# EAGLE board Triple_Axis_Accelerometer_-_Gyro_Breakout_-_MPU-6050-GiantPanel-v12 (EAGLE 6.4), part 1 of 8
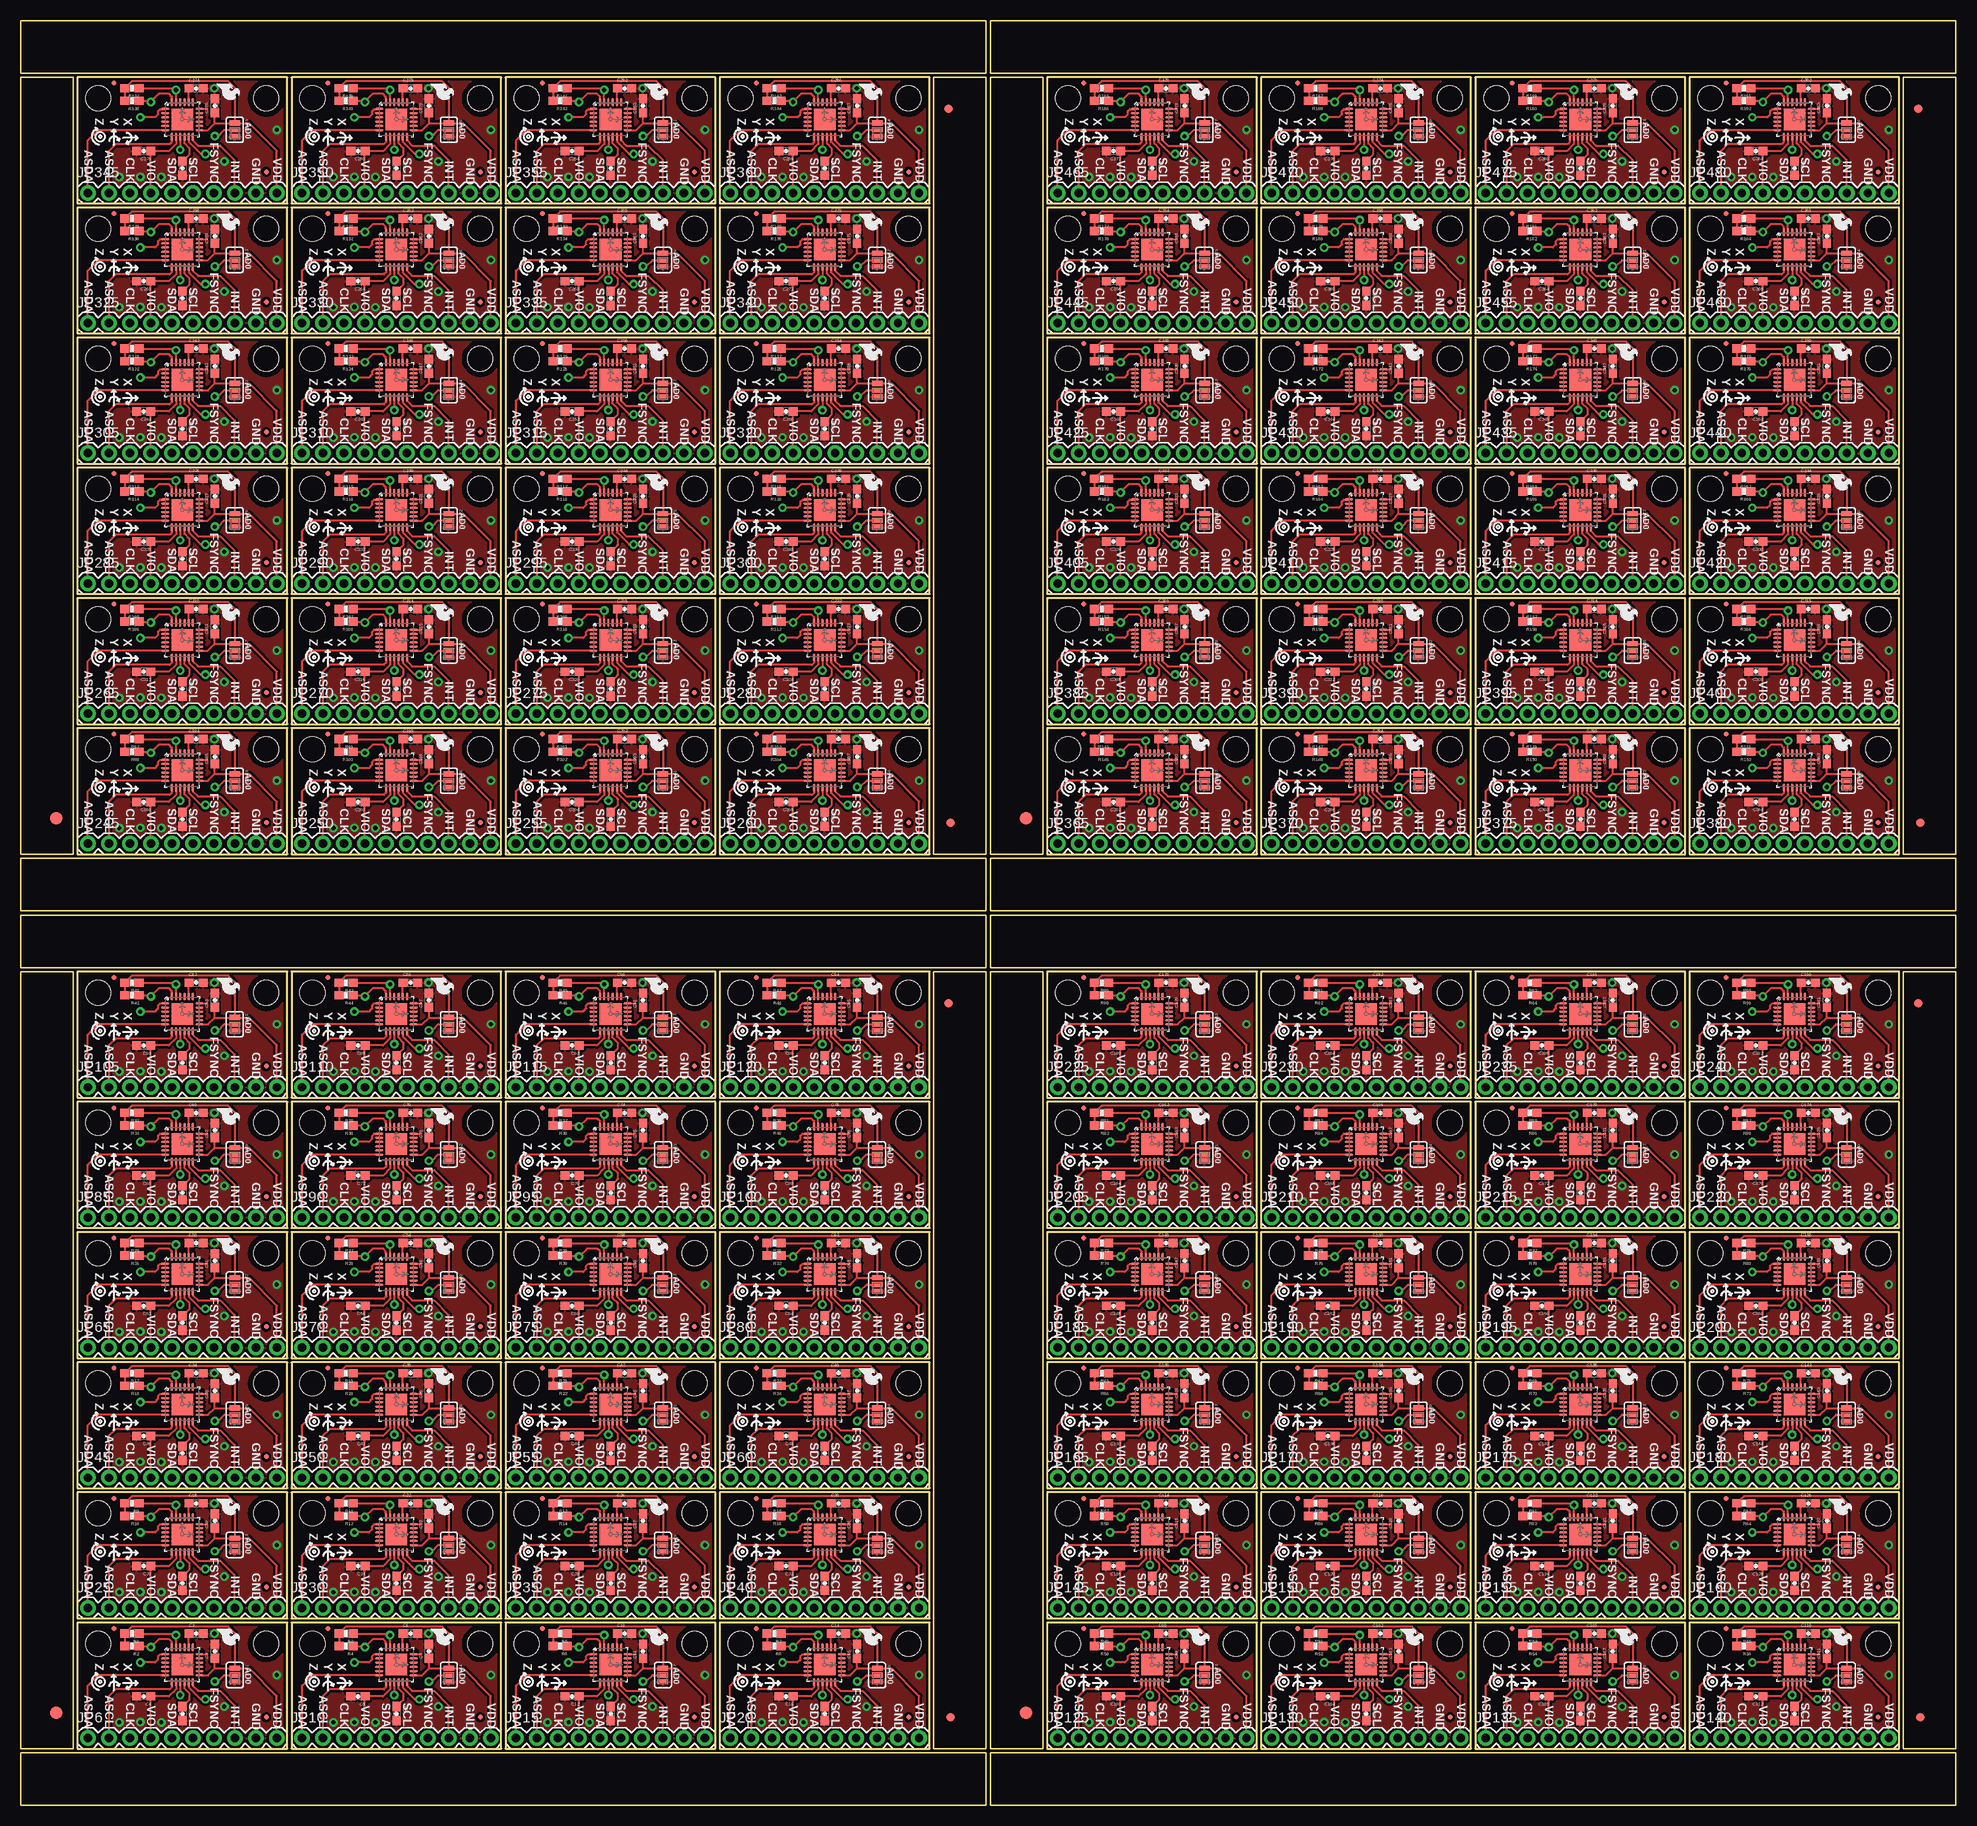
[diagram p0: board, top side]
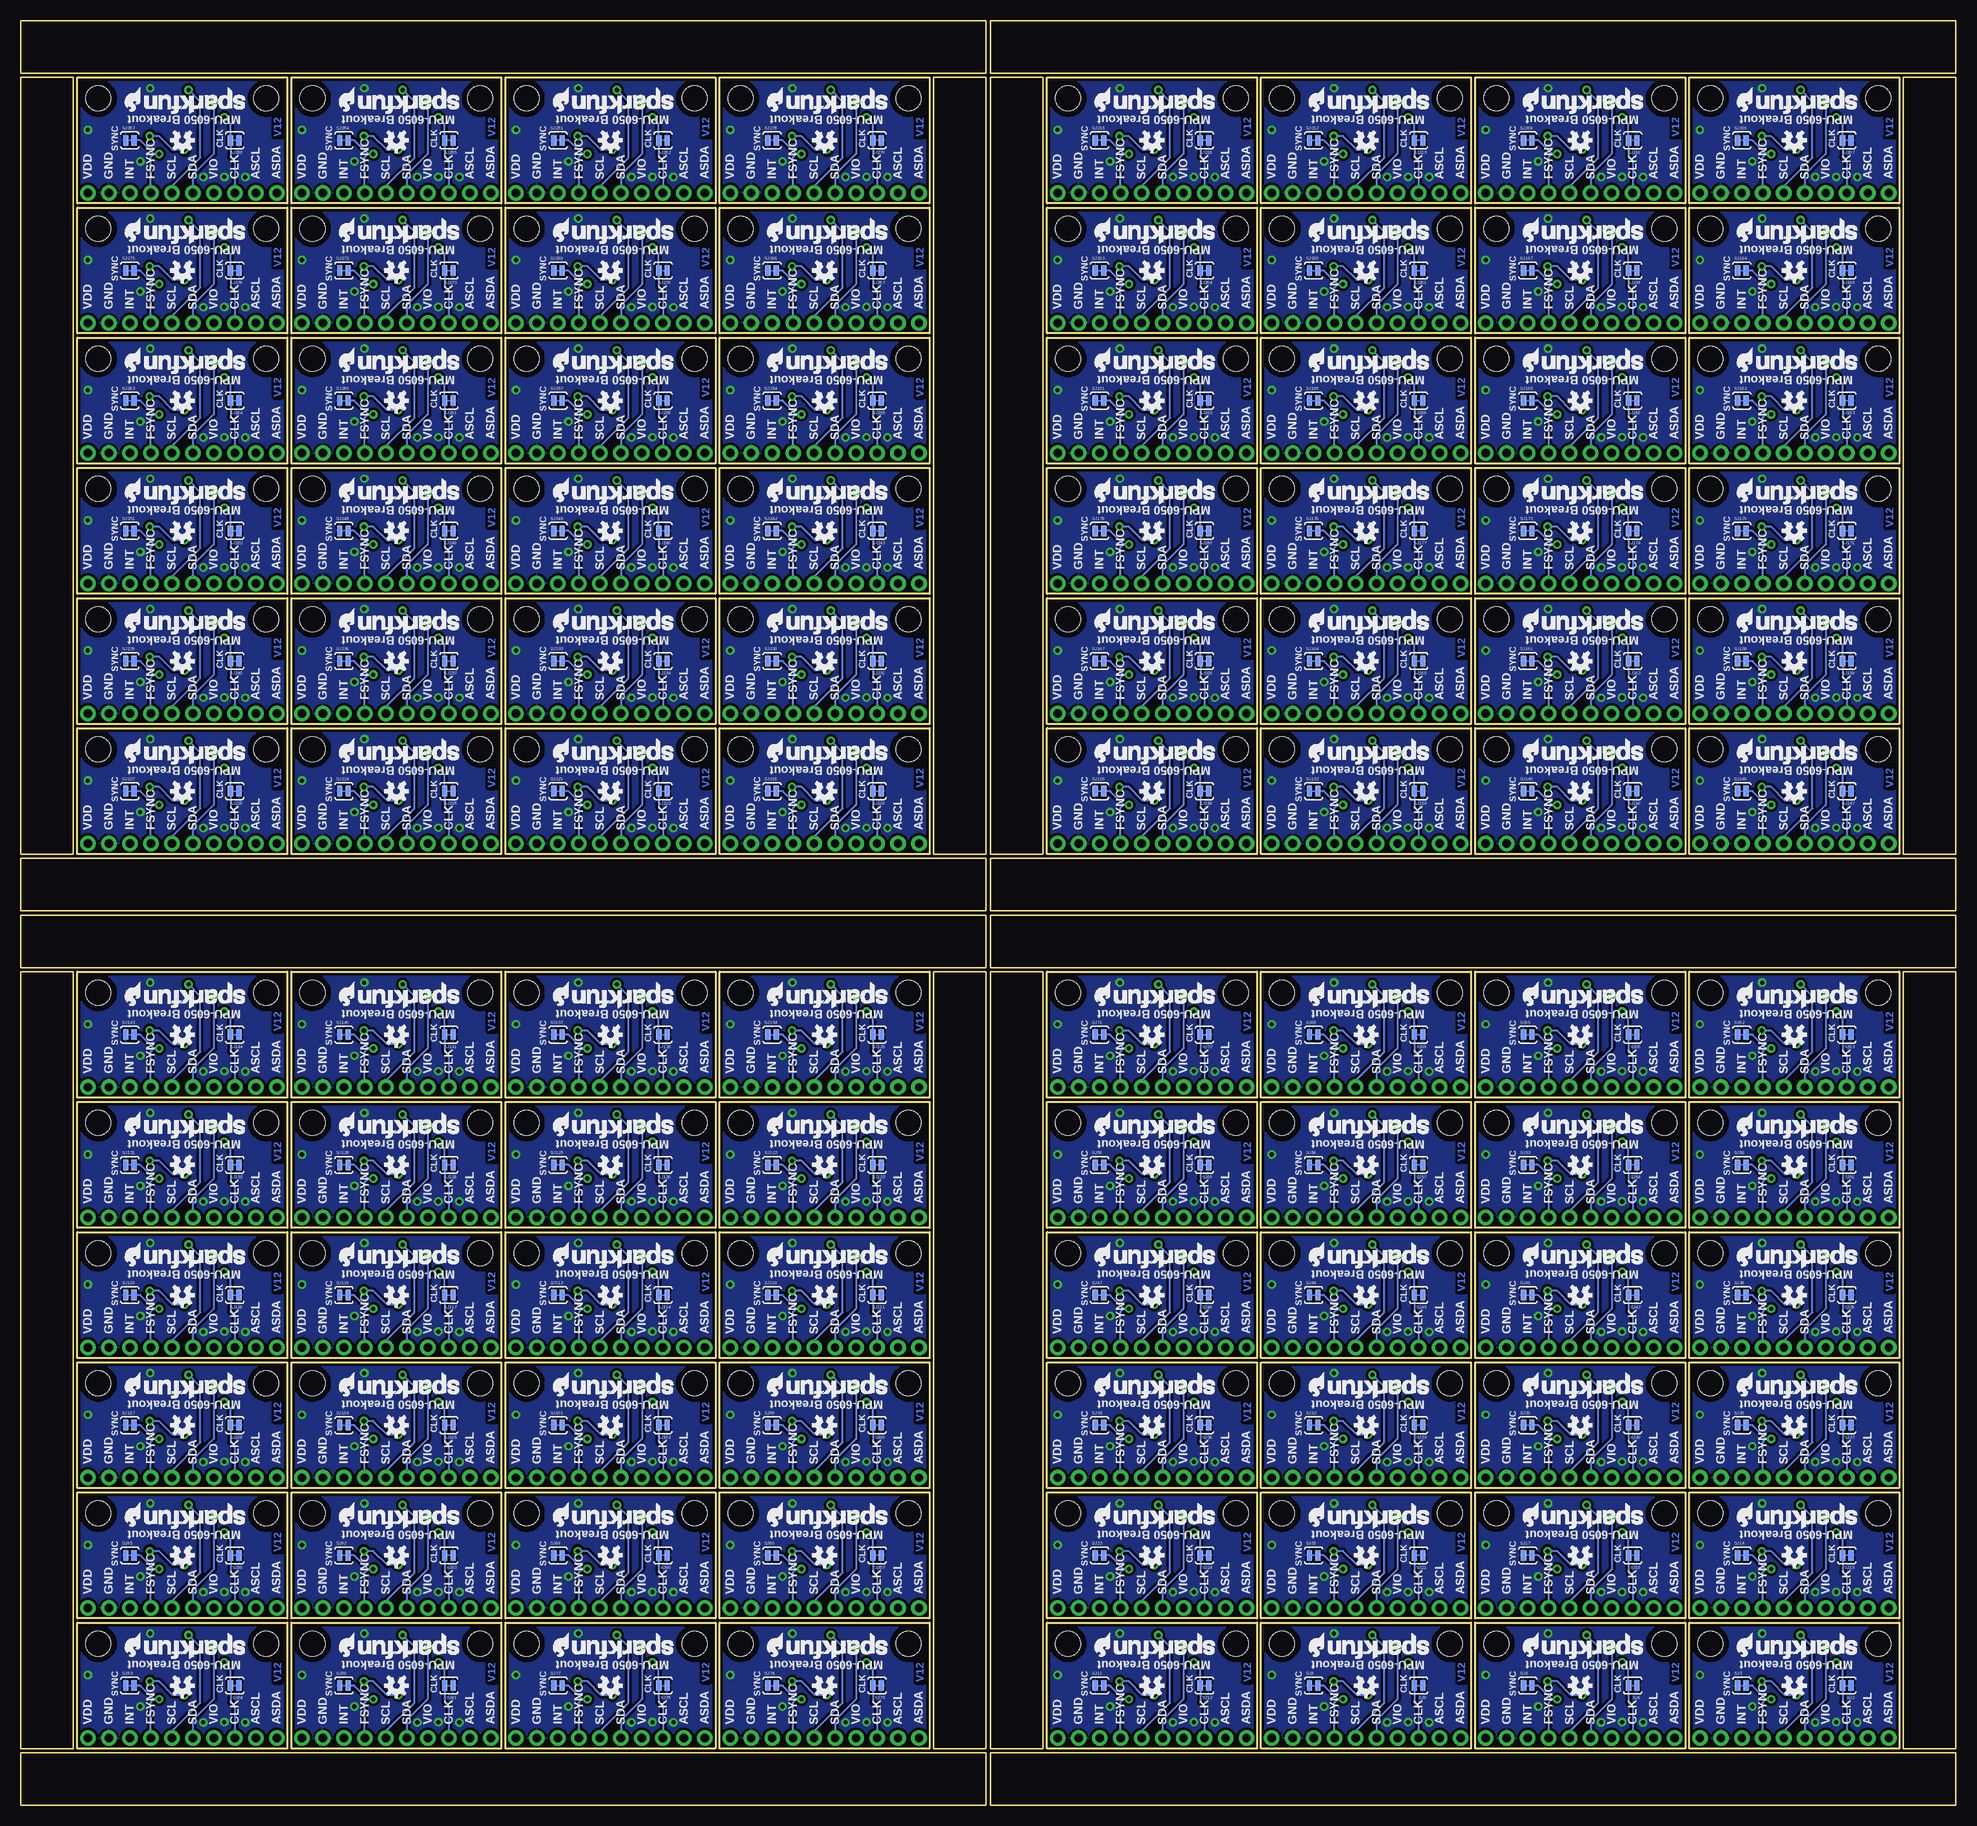
[diagram p1: board, bottom side, seen from below]

Size 234.19 x 215.9 mm. Coordinates in mm from the lower left corner, seen from the top.
Outline: 464 segments
Copper layers (1*16): Top 0.035mm / dielectric 1.5mm / Bottom 0.035mm
Design rules "SparkFun *": minimum track width 7mil, minimum drill 15mil, track to track 8mil, track to pad 8mil, pad to pad 8mil, via to via 8mil, smd to smd 8mil, copper to edge 8mil, drill to drill 8mil, minimum pad ring 12mil, minimum via ring 10mil, stop-mask expansion 4mil, vias tented up to drill 20mil, thermal gap 10mil
Net classes: 0 Default: width 0.203 mm; 1 vcc: width 0.254 mm; 2 GND: width 0.813 mm
tRestrict: area 21.4,18.4 to 22,18.7; area 47.3,18.4 to 47.9,18.7; area 73.2,18.4 to 73.8,18.7; area 99.1,18.4 to 99.7,18.7; area 21.4,34.2 to 22,34.4; area 47.3,34.2 to 47.9,34.4; area 73.2,34.2 to 73.8,34.4; area 99.1,34.2 to 99.7,34.4; area 21.4,49.9 to 22,50.2; area 47.3,49.9 to 47.9,50.2; area 73.2,49.9 to 73.8,50.2; area 99.1,49.9 to 99.7,50.2; 84 more areas

## Footprints (pad centres in the part's own frame; a part is rotated, then mirrored left to right if it is on the bottom)
0603-CAP = smd 1.1 x 1: 1 -0.85,0; 2 0.85,0
FIDUCIAL-1.5X3 = smd 1.5 x 1.5: 1 0,0
FIDUCIAL-1X2 = smd 1 x 1: 1 0,0
STAND-OFF-TIGHT = hole 3.048: 0,0
MICRO-FIDUCIAL = smd 0.635 x 0.635: 1 0,0
1X10 = drill 1.016 pad 1.88: 1 0,0; 2 2.54,0; 3 5.08,0; 4 7.62,0; 5 10.16,0; 6 12.7,0; 7 15.24,0; 8 17.78,0; 9 20.32,0; 10 22.86,0
0603-RES = smd 1.1 x 1: 1 -0.85,0; 2 0.85,0
SJ_3_PASTE2&3 = smd 0.635 x 1.27: 1 -0.813,0; 2 0,0; 3 0.813,0
SJ_2S-TRACE = smd 0.635 x 1.27: 1 -0.508,0; 2 0.508,0
QFN-24-4MM2 = smd 1.016 x 0.254: 1 -2.066,1.257; 2 -2.066,0.75; 3 -2.066,0.247; 4 -2.066,-0.287; 5 -2.066,-0.792; 6 -2.066,-1.297; 13 2.086,-1.297; 14 2.086,-0.792; 15 2.086,-0.287; 16 2.086,0.247; 17 2.086,0.75; 18 2.086,1.257 | smd 0.254 x 1.016: 7 -1.267,-2.122; 8 -0.762,-2.122; 9 -0.258,-2.122; 10 0.278,-2.122; 11 0.78,-2.122; 12 1.287,-2.122; 19 1.287,2.082; 20 0.78,2.082; 21 0.278,2.082; 22 -0.258,2.082; 23 -0.762,2.082; 24 -1.267,2.082 | smd 2.616 x 2.616: P$1 0.02,-0.01

## Placement (x,y rotation side)
C1  0.1uF  [0603-CAP]  19.58,11.1 270 top
C2  2.2nF  [0603-CAP]  21.26,20.78 0 top
C3  0.1uF  [0603-CAP]  23.5,18.64 90 top
C4  10nF  [0603-CAP]  14.91,13.18 180 top
C5  0.1uF  [0603-CAP]  45.49,11.1 270 top
C6  2.2nF  [0603-CAP]  47.17,20.78 0 top
C7  0.1uF  [0603-CAP]  49.4,18.64 90 top
C8  10nF  [0603-CAP]  40.82,13.18 180 top
C9  0.1uF  [0603-CAP]  71.4,11.1 270 top
C10  2.2nF  [0603-CAP]  73.08,20.78 0 top
C11  0.1uF  [0603-CAP]  75.31,18.64 90 top
C12  10nF  [0603-CAP]  66.73,13.18 180 top
C13  0.1uF  [0603-CAP]  97.31,11.1 270 top
C14  2.2nF  [0603-CAP]  98.98,20.78 0 top
C15  0.1uF  [0603-CAP]  101.22,18.64 90 top
C16  10nF  [0603-CAP]  92.63,13.18 180 top
C17  0.1uF  [0603-CAP]  19.58,26.85 270 top
C18  2.2nF  [0603-CAP]  21.26,36.53 0 top
C19  0.1uF  [0603-CAP]  23.5,34.39 90 top
C20  10nF  [0603-CAP]  14.91,28.93 180 top
C21  0.1uF  [0603-CAP]  45.49,26.85 270 top
C22  2.2nF  [0603-CAP]  47.17,36.53 0 top
C23  0.1uF  [0603-CAP]  49.4,34.39 90 top
C24  10nF  [0603-CAP]  40.82,28.93 180 top
C25  0.1uF  [0603-CAP]  71.4,26.85 270 top
C26  2.2nF  [0603-CAP]  73.08,36.53 0 top
C27  0.1uF  [0603-CAP]  75.31,34.39 90 top
C28  10nF  [0603-CAP]  66.73,28.93 180 top
C29  0.1uF  [0603-CAP]  97.31,26.85 270 top
C30  2.2nF  [0603-CAP]  98.98,36.53 0 top
C31  0.1uF  [0603-CAP]  101.22,34.39 90 top
C32  10nF  [0603-CAP]  92.63,28.93 180 top
C33  0.1uF  [0603-CAP]  19.58,42.6 270 top
C34  2.2nF  [0603-CAP]  21.26,52.27 0 top
C35  0.1uF  [0603-CAP]  23.5,50.14 90 top
C36  10nF  [0603-CAP]  14.91,44.68 180 top
C37  0.1uF  [0603-CAP]  45.49,42.6 270 top
C38  2.2nF  [0603-CAP]  47.17,52.27 0 top
C39  0.1uF  [0603-CAP]  49.4,50.14 90 top
C40  10nF  [0603-CAP]  40.82,44.68 180 top
C41  0.1uF  [0603-CAP]  71.4,42.6 270 top
C42  2.2nF  [0603-CAP]  73.08,52.27 0 top
C43  0.1uF  [0603-CAP]  75.31,50.14 90 top
C44  10nF  [0603-CAP]  66.73,44.68 180 top
C45  0.1uF  [0603-CAP]  97.31,42.6 270 top
C46  2.2nF  [0603-CAP]  98.98,52.27 0 top
C47  0.1uF  [0603-CAP]  101.22,50.14 90 top
C48  10nF  [0603-CAP]  92.63,44.68 180 top
C49  0.1uF  [0603-CAP]  19.58,58.34 270 top
C50  2.2nF  [0603-CAP]  21.26,68.02 0 top
C51  0.1uF  [0603-CAP]  23.5,65.89 90 top
C52  10nF  [0603-CAP]  14.91,60.43 180 top
C53  0.1uF  [0603-CAP]  45.49,58.34 270 top
C54  2.2nF  [0603-CAP]  47.17,68.02 0 top
C55  0.1uF  [0603-CAP]  49.4,65.89 90 top
C56  10nF  [0603-CAP]  40.82,60.43 180 top
C57  0.1uF  [0603-CAP]  71.4,58.34 270 top
C58  2.2nF  [0603-CAP]  73.08,68.02 0 top
C59  0.1uF  [0603-CAP]  75.31,65.89 90 top
C60  10nF  [0603-CAP]  66.73,60.43 180 top
C61  0.1uF  [0603-CAP]  97.31,58.34 270 top
C62  2.2nF  [0603-CAP]  98.98,68.02 0 top
C63  0.1uF  [0603-CAP]  101.22,65.89 90 top
C64  10nF  [0603-CAP]  92.63,60.43 180 top
C65  0.1uF  [0603-CAP]  19.58,74.09 270 top
C66  2.2nF  [0603-CAP]  21.26,83.77 0 top
C67  0.1uF  [0603-CAP]  23.5,81.64 90 top
C68  10nF  [0603-CAP]  14.91,76.17 180 top
C69  0.1uF  [0603-CAP]  45.49,74.09 270 top
C70  2.2nF  [0603-CAP]  47.17,83.77 0 top
C71  0.1uF  [0603-CAP]  49.4,81.64 90 top
C72  10nF  [0603-CAP]  40.82,76.17 180 top
C73  0.1uF  [0603-CAP]  71.4,74.09 270 top
C74  2.2nF  [0603-CAP]  73.08,83.77 0 top
C75  0.1uF  [0603-CAP]  75.31,81.64 90 top
C76  10nF  [0603-CAP]  66.73,76.17 180 top
C77  0.1uF  [0603-CAP]  97.31,74.09 270 top
C78  2.2nF  [0603-CAP]  98.98,83.77 0 top
C79  0.1uF  [0603-CAP]  101.22,81.64 90 top
C80  10nF  [0603-CAP]  92.63,76.17 180 top
C81  0.1uF  [0603-CAP]  19.58,89.84 270 top
C82  2.2nF  [0603-CAP]  21.26,99.52 0 top
C83  0.1uF  [0603-CAP]  23.5,97.38 90 top
C84  10nF  [0603-CAP]  14.91,91.92 180 top
C85  0.1uF  [0603-CAP]  45.49,89.84 270 top
C86  2.2nF  [0603-CAP]  47.17,99.52 0 top
C87  0.1uF  [0603-CAP]  49.4,97.38 90 top
C88  10nF  [0603-CAP]  40.82,91.92 180 top
C89  0.1uF  [0603-CAP]  71.4,89.84 270 top
C90  2.2nF  [0603-CAP]  73.08,99.52 0 top
C91  0.1uF  [0603-CAP]  75.31,97.38 90 top
C92  10nF  [0603-CAP]  66.73,91.92 180 top
C93  0.1uF  [0603-CAP]  97.31,89.84 270 top
C94  2.2nF  [0603-CAP]  98.98,99.52 0 top
C95  0.1uF  [0603-CAP]  101.22,97.38 90 top
C96  10nF  [0603-CAP]  92.63,91.92 180 top
C97  0.1uF  [0603-CAP]  136.93,11.1 270 top
C98  2.2nF  [0603-CAP]  138.61,20.78 0 top
C99  0.1uF  [0603-CAP]  140.84,18.64 90 top
C100  10nF  [0603-CAP]  132.26,13.18 180 top
C101  0.1uF  [0603-CAP]  162.84,11.1 270 top
C102  2.2nF  [0603-CAP]  164.52,20.78 0 top
C103  0.1uF  [0603-CAP]  166.75,18.64 90 top
C104  10nF  [0603-CAP]  158.17,13.18 180 top
C105  0.1uF  [0603-CAP]  188.75,11.1 270 top
C106  2.2nF  [0603-CAP]  190.42,20.78 0 top
C107  0.1uF  [0603-CAP]  192.66,18.64 90 top
C108  10nF  [0603-CAP]  184.07,13.18 180 top
C109  0.1uF  [0603-CAP]  214.66,11.1 270 top
C110  2.2nF  [0603-CAP]  216.33,20.78 0 top
C111  0.1uF  [0603-CAP]  218.57,18.64 90 top
C112  10nF  [0603-CAP]  209.98,13.18 180 top
C113  0.1uF  [0603-CAP]  136.93,26.85 270 top
C114  2.2nF  [0603-CAP]  138.61,36.53 0 top
C115  0.1uF  [0603-CAP]  140.84,34.39 90 top
C116  10nF  [0603-CAP]  132.26,28.93 180 top
C117  0.1uF  [0603-CAP]  162.84,26.85 270 top
C118  2.2nF  [0603-CAP]  164.52,36.53 0 top
C119  0.1uF  [0603-CAP]  166.75,34.39 90 top
C120  10nF  [0603-CAP]  158.17,28.93 180 top
C121  0.1uF  [0603-CAP]  188.75,26.85 270 top
C122  2.2nF  [0603-CAP]  190.42,36.53 0 top
C123  0.1uF  [0603-CAP]  192.66,34.39 90 top
C124  10nF  [0603-CAP]  184.07,28.93 180 top
C125  0.1uF  [0603-CAP]  214.66,26.85 270 top
C126  2.2nF  [0603-CAP]  216.33,36.53 0 top
C127  0.1uF  [0603-CAP]  218.57,34.39 90 top
C128  10nF  [0603-CAP]  209.98,28.93 180 top
C129  0.1uF  [0603-CAP]  136.93,42.6 270 top
C130  2.2nF  [0603-CAP]  138.61,52.27 0 top
C131  0.1uF  [0603-CAP]  140.84,50.14 90 top
C132  10nF  [0603-CAP]  132.26,44.68 180 top
C133  0.1uF  [0603-CAP]  162.84,42.6 270 top
C134  2.2nF  [0603-CAP]  164.52,52.27 0 top
C135  0.1uF  [0603-CAP]  166.75,50.14 90 top
C136  10nF  [0603-CAP]  158.17,44.68 180 top
C137  0.1uF  [0603-CAP]  188.75,42.6 270 top
C138  2.2nF  [0603-CAP]  190.42,52.27 0 top
C139  0.1uF  [0603-CAP]  192.66,50.14 90 top
C140  10nF  [0603-CAP]  184.07,44.68 180 top
C141  0.1uF  [0603-CAP]  214.66,42.6 270 top
C142  2.2nF  [0603-CAP]  216.33,52.27 0 top
C143  0.1uF  [0603-CAP]  218.57,50.14 90 top
C144  10nF  [0603-CAP]  209.98,44.68 180 top
C145  0.1uF  [0603-CAP]  136.93,58.34 270 top
C146  2.2nF  [0603-CAP]  138.61,68.02 0 top
C147  0.1uF  [0603-CAP]  140.84,65.89 90 top
C148  10nF  [0603-CAP]  132.26,60.43 180 top
C149  0.1uF  [0603-CAP]  162.84,58.34 270 top
C150  2.2nF  [0603-CAP]  164.52,68.02 0 top
C151  0.1uF  [0603-CAP]  166.75,65.89 90 top
C152  10nF  [0603-CAP]  158.17,60.43 180 top
C153  0.1uF  [0603-CAP]  188.75,58.34 270 top
C154  2.2nF  [0603-CAP]  190.42,68.02 0 top
C155  0.1uF  [0603-CAP]  192.66,65.89 90 top
C156  10nF  [0603-CAP]  184.07,60.43 180 top
C157  0.1uF  [0603-CAP]  214.66,58.34 270 top
C158  2.2nF  [0603-CAP]  216.33,68.02 0 top
C159  0.1uF  [0603-CAP]  218.57,65.89 90 top
C160  10nF  [0603-CAP]  209.98,60.43 180 top
C161  0.1uF  [0603-CAP]  136.93,74.09 270 top
C162  2.2nF  [0603-CAP]  138.61,83.77 0 top
C163  0.1uF  [0603-CAP]  140.84,81.64 90 top
C164  10nF  [0603-CAP]  132.26,76.17 180 top
C165  0.1uF  [0603-CAP]  162.84,74.09 270 top
C166  2.2nF  [0603-CAP]  164.52,83.77 0 top
C167  0.1uF  [0603-CAP]  166.75,81.64 90 top
C168  10nF  [0603-CAP]  158.17,76.17 180 top
C169  0.1uF  [0603-CAP]  188.75,74.09 270 top
C170  2.2nF  [0603-CAP]  190.42,83.77 0 top
C171  0.1uF  [0603-CAP]  192.66,81.64 90 top
C172  10nF  [0603-CAP]  184.07,76.17 180 top
C173  0.1uF  [0603-CAP]  214.66,74.09 270 top
C174  2.2nF  [0603-CAP]  216.33,83.77 0 top
C175  0.1uF  [0603-CAP]  218.57,81.64 90 top
C176  10nF  [0603-CAP]  209.98,76.17 180 top
C177  0.1uF  [0603-CAP]  136.93,89.84 270 top
C178  2.2nF  [0603-CAP]  138.61,99.52 0 top
C179  0.1uF  [0603-CAP]  140.84,97.38 90 top
C180  10nF  [0603-CAP]  132.26,91.92 180 top
C181  0.1uF  [0603-CAP]  162.84,89.84 270 top
C182  2.2nF  [0603-CAP]  164.52,99.52 0 top
C183  0.1uF  [0603-CAP]  166.75,97.38 90 top
C184  10nF  [0603-CAP]  158.17,91.92 180 top
C185  0.1uF  [0603-CAP]  188.75,89.84 270 top
C186  2.2nF  [0603-CAP]  190.42,99.52 0 top
C187  0.1uF  [0603-CAP]  192.66,97.38 90 top
C188  10nF  [0603-CAP]  184.07,91.92 180 top
C189  0.1uF  [0603-CAP]  214.66,89.84 270 top
C190  2.2nF  [0603-CAP]  216.33,99.52 0 top
C191  0.1uF  [0603-CAP]  218.57,97.38 90 top
C192  10nF  [0603-CAP]  209.98,91.92 180 top
C193  0.1uF  [0603-CAP]  19.58,119.3 270 top
C194  2.2nF  [0603-CAP]  21.26,128.98 0 top
C195  0.1uF  [0603-CAP]  23.5,126.85 90 top
C196  10nF  [0603-CAP]  14.91,121.39 180 top
C197  0.1uF  [0603-CAP]  45.49,119.3 270 top
C198  2.2nF  [0603-CAP]  47.17,128.98 0 top
C199  0.1uF  [0603-CAP]  49.4,126.85 90 top
C200  10nF  [0603-CAP]  40.82,121.39 180 top
C201  0.1uF  [0603-CAP]  71.4,119.3 270 top
C202  2.2nF  [0603-CAP]  73.08,128.98 0 top
C203  0.1uF  [0603-CAP]  75.31,126.85 90 top
C204  10nF  [0603-CAP]  66.73,121.39 180 top
C205  0.1uF  [0603-CAP]  97.31,119.3 270 top
C206  2.2nF  [0603-CAP]  98.98,128.98 0 top
C207  0.1uF  [0603-CAP]  101.22,126.85 90 top
C208  10nF  [0603-CAP]  92.63,121.39 180 top
C209  0.1uF  [0603-CAP]  19.58,135.05 270 top
C210  2.2nF  [0603-CAP]  21.26,144.73 0 top
C211  0.1uF  [0603-CAP]  23.5,142.6 90 top
C212  10nF  [0603-CAP]  14.91,137.13 180 top
C213  0.1uF  [0603-CAP]  45.49,135.05 270 top
C214  2.2nF  [0603-CAP]  47.17,144.73 0 top
C215  0.1uF  [0603-CAP]  49.4,142.6 90 top
C216  10nF  [0603-CAP]  40.82,137.13 180 top
C217  0.1uF  [0603-CAP]  71.4,135.05 270 top
C218  2.2nF  [0603-CAP]  73.08,144.73 0 top
C219  0.1uF  [0603-CAP]  75.31,142.6 90 top
C220  10nF  [0603-CAP]  66.73,137.13 180 top
C221  0.1uF  [0603-CAP]  97.31,135.05 270 top
C222  2.2nF  [0603-CAP]  98.98,144.73 0 top
C223  0.1uF  [0603-CAP]  101.22,142.6 90 top
C224  10nF  [0603-CAP]  92.63,137.13 180 top
C225  0.1uF  [0603-CAP]  19.58,150.8 270 top
C226  2.2nF  [0603-CAP]  21.26,160.48 0 top
C227  0.1uF  [0603-CAP]  23.5,158.34 90 top
C228  10nF  [0603-CAP]  14.91,152.88 180 top
C229  0.1uF  [0603-CAP]  45.49,150.8 270 top
C230  2.2nF  [0603-CAP]  47.17,160.48 0 top
C231  0.1uF  [0603-CAP]  49.4,158.34 90 top
C232  10nF  [0603-CAP]  40.82,152.88 180 top
C233  0.1uF  [0603-CAP]  71.4,150.8 270 top
C234  2.2nF  [0603-CAP]  73.08,160.48 0 top
C235  0.1uF  [0603-CAP]  75.31,158.34 90 top
C236  10nF  [0603-CAP]  66.73,152.88 180 top
C237  0.1uF  [0603-CAP]  97.31,150.8 270 top
C238  2.2nF  [0603-CAP]  98.98,160.48 0 top
C239  0.1uF  [0603-CAP]  101.22,158.34 90 top
C240  10nF  [0603-CAP]  92.63,152.88 180 top
C241  0.1uF  [0603-CAP]  19.58,166.55 270 top
C242  2.2nF  [0603-CAP]  21.26,176.23 0 top
C243  0.1uF  [0603-CAP]  23.5,174.09 90 top
C244  10nF  [0603-CAP]  14.91,168.63 180 top
C245  0.1uF  [0603-CAP]  45.49,166.55 270 top
C246  2.2nF  [0603-CAP]  47.17,176.23 0 top
C247  0.1uF  [0603-CAP]  49.4,174.09 90 top
C248  10nF  [0603-CAP]  40.82,168.63 180 top
C249  0.1uF  [0603-CAP]  71.4,166.55 270 top
C250  2.2nF  [0603-CAP]  73.08,176.23 0 top
C251  0.1uF  [0603-CAP]  75.31,174.09 90 top
C252  10nF  [0603-CAP]  66.73,168.63 180 top
C253  0.1uF  [0603-CAP]  97.31,166.55 270 top
C254  2.2nF  [0603-CAP]  98.98,176.23 0 top
C255  0.1uF  [0603-CAP]  101.22,174.09 90 top
C256  10nF  [0603-CAP]  92.63,168.63 180 top
C257  0.1uF  [0603-CAP]  19.58,182.3 270 top
C258  2.2nF  [0603-CAP]  21.26,191.97 0 top
C259  0.1uF  [0603-CAP]  23.5,189.84 90 top
C260  10nF  [0603-CAP]  14.91,184.38 180 top
C261  0.1uF  [0603-CAP]  45.49,182.3 270 top
C262  2.2nF  [0603-CAP]  47.17,191.97 0 top
C263  0.1uF  [0603-CAP]  49.4,189.84 90 top
C264  10nF  [0603-CAP]  40.82,184.38 180 top
C265  0.1uF  [0603-CAP]  71.4,182.3 270 top
C266  2.2nF  [0603-CAP]  73.08,191.97 0 top
C267  0.1uF  [0603-CAP]  75.31,189.84 90 top
C268  10nF  [0603-CAP]  66.73,184.38 180 top
C269  0.1uF  [0603-CAP]  97.31,182.3 270 top
C270  2.2nF  [0603-CAP]  98.98,191.97 0 top
C271  0.1uF  [0603-CAP]  101.22,189.84 90 top
C272  10nF  [0603-CAP]  92.63,184.38 180 top
C273  0.1uF  [0603-CAP]  19.58,198.04 270 top
C274  2.2nF  [0603-CAP]  21.26,207.72 0 top
C275  0.1uF  [0603-CAP]  23.5,205.59 90 top
C276  10nF  [0603-CAP]  14.91,200.13 180 top
C277  0.1uF  [0603-CAP]  45.49,198.04 270 top
C278  2.2nF  [0603-CAP]  47.17,207.72 0 top
C279  0.1uF  [0603-CAP]  49.4,205.59 90 top
C280  10nF  [0603-CAP]  40.82,200.13 180 top
C281  0.1uF  [0603-CAP]  71.4,198.04 270 top
C282  2.2nF  [0603-CAP]  73.08,207.72 0 top
C283  0.1uF  [0603-CAP]  75.31,205.59 90 top
C284  10nF  [0603-CAP]  66.73,200.13 180 top
C285  0.1uF  [0603-CAP]  97.31,198.04 270 top
C286  2.2nF  [0603-CAP]  98.98,207.72 0 top
C287  0.1uF  [0603-CAP]  101.22,205.59 90 top
C288  10nF  [0603-CAP]  92.63,200.13 180 top
C289  0.1uF  [0603-CAP]  136.93,119.3 270 top
C290  2.2nF  [0603-CAP]  138.61,128.98 0 top
C291  0.1uF  [0603-CAP]  140.84,126.85 90 top
C292  10nF  [0603-CAP]  132.26,121.39 180 top
C293  0.1uF  [0603-CAP]  162.84,119.3 270 top
C294  2.2nF  [0603-CAP]  164.52,128.98 0 top
C295  0.1uF  [0603-CAP]  166.75,126.85 90 top
C296  10nF  [0603-CAP]  158.17,121.39 180 top
C297  0.1uF  [0603-CAP]  188.75,119.3 270 top
C298  2.2nF  [0603-CAP]  190.42,128.98 0 top
C299  0.1uF  [0603-CAP]  192.66,126.85 90 top
C300  10nF  [0603-CAP]  184.07,121.39 180 top
C301  0.1uF  [0603-CAP]  214.66,119.3 270 top
C302  2.2nF  [0603-CAP]  216.33,128.98 0 top
C303  0.1uF  [0603-CAP]  218.57,126.85 90 top
C304  10nF  [0603-CAP]  209.98,121.39 180 top
C305  0.1uF  [0603-CAP]  136.93,135.05 270 top
C306  2.2nF  [0603-CAP]  138.61,144.73 0 top
C307  0.1uF  [0603-CAP]  140.84,142.6 90 top
C308  10nF  [0603-CAP]  132.26,137.13 180 top
C309  0.1uF  [0603-CAP]  162.84,135.05 270 top
C310  2.2nF  [0603-CAP]  164.52,144.73 0 top
C311  0.1uF  [0603-CAP]  166.75,142.6 90 top
C312  10nF  [0603-CAP]  158.17,137.13 180 top
C313  0.1uF  [0603-CAP]  188.75,135.05 270 top
C314  2.2nF  [0603-CAP]  190.42,144.73 0 top
C315  0.1uF  [0603-CAP]  192.66,142.6 90 top
C316  10nF  [0603-CAP]  184.07,137.13 180 top
C317  0.1uF  [0603-CAP]  214.66,135.05 270 top
C318  2.2nF  [0603-CAP]  216.33,144.73 0 top
C319  0.1uF  [0603-CAP]  218.57,142.6 90 top
C320  10nF  [0603-CAP]  209.98,137.13 180 top
C321  0.1uF  [0603-CAP]  136.93,150.8 270 top
C322  2.2nF  [0603-CAP]  138.61,160.48 0 top
C323  0.1uF  [0603-CAP]  140.84,158.34 90 top
C324  10nF  [0603-CAP]  132.26,152.88 180 top
C325  0.1uF  [0603-CAP]  162.84,150.8 270 top
C326  2.2nF  [0603-CAP]  164.52,160.48 0 top
C327  0.1uF  [0603-CAP]  166.75,158.34 90 top
C328  10nF  [0603-CAP]  158.17,152.88 180 top
C329  0.1uF  [0603-CAP]  188.75,150.8 270 top
C330  2.2nF  [0603-CAP]  190.42,160.48 0 top
C331  0.1uF  [0603-CAP]  192.66,158.34 90 top
C332  10nF  [0603-CAP]  184.07,152.88 180 top
C333  0.1uF  [0603-CAP]  214.66,150.8 270 top
C334  2.2nF  [0603-CAP]  216.33,160.48 0 top
C335  0.1uF  [0603-CAP]  218.57,158.34 90 top
C336  10nF  [0603-CAP]  209.98,152.88 180 top
C337  0.1uF  [0603-CAP]  136.93,166.55 270 top
C338  2.2nF  [0603-CAP]  138.61,176.23 0 top
C339  0.1uF  [0603-CAP]  140.84,174.09 90 top
C340  10nF  [0603-CAP]  132.26,168.63 180 top
C341  0.1uF  [0603-CAP]  162.84,166.55 270 top
C342  2.2nF  [0603-CAP]  164.52,176.23 0 top
C343  0.1uF  [0603-CAP]  166.75,174.09 90 top
C344  10nF  [0603-CAP]  158.17,168.63 180 top
C345  0.1uF  [0603-CAP]  188.75,166.55 270 top
C346  2.2nF  [0603-CAP]  190.42,176.23 0 top
C347  0.1uF  [0603-CAP]  192.66,174.09 90 top
C348  10nF  [0603-CAP]  184.07,168.63 180 top
C349  0.1uF  [0603-CAP]  214.66,166.55 270 top
C350  2.2nF  [0603-CAP]  216.33,176.23 0 top
C351  0.1uF  [0603-CAP]  218.57,174.09 90 top
C352  10nF  [0603-CAP]  209.98,168.63 180 top
C353  0.1uF  [0603-CAP]  136.93,182.3 270 top
C354  2.2nF  [0603-CAP]  138.61,191.97 0 top
C355  0.1uF  [0603-CAP]  140.84,189.84 90 top
C356  10nF  [0603-CAP]  132.26,184.38 180 top
C357  0.1uF  [0603-CAP]  162.84,182.3 270 top
C358  2.2nF  [0603-CAP]  164.52,191.97 0 top
C359  0.1uF  [0603-CAP]  166.75,189.84 90 top
C360  10nF  [0603-CAP]  158.17,184.38 180 top
C361  0.1uF  [0603-CAP]  188.75,182.3 270 top
C362  2.2nF  [0603-CAP]  190.42,191.97 0 top
C363  0.1uF  [0603-CAP]  192.66,189.84 90 top
C364  10nF  [0603-CAP]  184.07,184.38 180 top
C365  0.1uF  [0603-CAP]  214.66,182.3 270 top
C366  2.2nF  [0603-CAP]  216.33,191.97 0 top
C367  0.1uF  [0603-CAP]  218.57,189.84 90 top
C368  10nF  [0603-CAP]  209.98,184.38 180 top
C369  0.1uF  [0603-CAP]  136.93,198.04 270 top
C370  2.2nF  [0603-CAP]  138.61,207.72 0 top
C371  0.1uF  [0603-CAP]  140.84,205.59 90 top
C372  10nF  [0603-CAP]  132.26,200.13 180 top
C373  0.1uF  [0603-CAP]  162.84,198.04 270 top
C374  2.2nF  [0603-CAP]  164.52,207.72 0 top
C375  0.1uF  [0603-CAP]  166.75,205.59 90 top
C376  10nF  [0603-CAP]  158.17,200.13 180 top
C377  0.1uF  [0603-CAP]  188.75,198.04 270 top
C378  2.2nF  [0603-CAP]  190.42,207.72 0 top
C379  0.1uF  [0603-CAP]  192.66,205.59 90 top
C380  10nF  [0603-CAP]  184.07,200.13 180 top
C381  0.1uF  [0603-CAP]  214.66,198.04 270 top
C382  2.2nF  [0603-CAP]  216.33,207.72 0 top
C383  0.1uF  [0603-CAP]  218.57,205.59 90 top
C384  10nF  [0603-CAP]  209.98,200.13 180 top
E$1  [FIDUCIAL-1.5X3]  4.32,11.18 0 top
E$2  [FIDUCIAL-1X2]  229.87,10.67 0 top
E$3  [FIDUCIAL-1X2]  229.62,97.03 180 top
E$4  [FIDUCIAL-1X2]  112.52,10.67 0 top
E$5  [FIDUCIAL-1X2]  112.27,97.03 180 top
E$6  [FIDUCIAL-1.5X3]  121.67,11.18 0 top
E$7  [FIDUCIAL-1X2]  112.52,118.87 0 top
E$8  [FIDUCIAL-1X2]  112.27,205.23 180 top
E$9  [FIDUCIAL-1.5X3]  4.32,119.38 0 top
E$10  [FIDUCIAL-1X2]  229.87,118.87 0 top
E$11  [FIDUCIAL-1X2]  229.62,205.23 180 top
E$12  [FIDUCIAL-1.5X3]  121.67,119.38 0 top
JP1  STAND-OFFTIGHT  [STAND-OFF-TIGHT]  55.63,19.56 270 top
JP2  FIDUCIALUFIDUCIAL  [MICRO-FIDUCIAL]  11.3,21.39 270 top
JP3  STAND-OFFTIGHT  [STAND-OFF-TIGHT]  29.72,19.56 270 top
JP4  STAND-OFFTIGHT  [STAND-OFF-TIGHT]  9.4,19.56 270 top
JP5  FIDUCIALUFIDUCIAL  [MICRO-FIDUCIAL]  29.72,10.67 270 top
JP6  M10"  [1X10]  8.13,8.13 0 top
JP7  STAND-OFFTIGHT  [STAND-OFF-TIGHT]  35.31,19.56 270 top
JP8  FIDUCIALUFIDUCIAL  [MICRO-FIDUCIAL]  37.21,21.39 270 top
JP9  FIDUCIALUFIDUCIAL  [MICRO-FIDUCIAL]  55.63,10.67 270 top
JP10  M10"  [1X10]  34.04,8.13 0 top
JP11  STAND-OFFTIGHT  [STAND-OFF-TIGHT]  81.53,19.56 270 top
JP12  STAND-OFFTIGHT  [STAND-OFF-TIGHT]  61.21,19.56 270 top
JP13  FIDUCIALUFIDUCIAL  [MICRO-FIDUCIAL]  63.12,21.39 270 top
JP14  FIDUCIALUFIDUCIAL  [MICRO-FIDUCIAL]  81.53,10.67 270 top
JP15  M10"  [1X10]  59.94,8.13 0 top
JP16  STAND-OFFTIGHT  [STAND-OFF-TIGHT]  107.44,19.56 270 top
JP17  STAND-OFFTIGHT  [STAND-OFF-TIGHT]  87.12,19.56 270 top
JP18  FIDUCIALUFIDUCIAL  [MICRO-FIDUCIAL]  89.03,21.39 270 top
JP19  FIDUCIALUFIDUCIAL  [MICRO-FIDUCIAL]  107.44,10.67 270 top
JP20  M10"  [1X10]  85.85,8.13 0 top
JP21  STAND-OFFTIGHT  [STAND-OFF-TIGHT]  29.72,35.31 270 top
JP22  STAND-OFFTIGHT  [STAND-OFF-TIGHT]  9.4,35.31 270 top
JP23  FIDUCIALUFIDUCIAL  [MICRO-FIDUCIAL]  11.3,37.13 270 top
JP24  FIDUCIALUFIDUCIAL  [MICRO-FIDUCIAL]  29.72,26.42 270 top
JP25  M10"  [1X10]  8.13,23.88 0 top
JP26  STAND-OFFTIGHT  [STAND-OFF-TIGHT]  55.63,35.31 270 top
JP27  STAND-OFFTIGHT  [STAND-OFF-TIGHT]  35.31,35.31 270 top
JP28  FIDUCIALUFIDUCIAL  [MICRO-FIDUCIAL]  37.21,37.13 270 top
JP29  FIDUCIALUFIDUCIAL  [MICRO-FIDUCIAL]  55.63,26.42 270 top
JP30  M10"  [1X10]  34.04,23.88 0 top
JP31  STAND-OFFTIGHT  [STAND-OFF-TIGHT]  81.53,35.31 270 top
JP32  STAND-OFFTIGHT  [STAND-OFF-TIGHT]  61.21,35.31 270 top
JP33  FIDUCIALUFIDUCIAL  [MICRO-FIDUCIAL]  63.12,37.13 270 top
JP34  FIDUCIALUFIDUCIAL  [MICRO-FIDUCIAL]  81.53,26.42 270 top
JP35  M10"  [1X10]  59.94,23.88 0 top
JP36  STAND-OFFTIGHT  [STAND-OFF-TIGHT]  107.44,35.31 270 top
JP37  STAND-OFFTIGHT  [STAND-OFF-TIGHT]  87.12,35.31 270 top
JP38  FIDUCIALUFIDUCIAL  [MICRO-FIDUCIAL]  89.03,37.13 270 top
JP39  FIDUCIALUFIDUCIAL  [MICRO-FIDUCIAL]  107.44,26.42 270 top
JP40  M10"  [1X10]  85.85,23.88 0 top
JP41  STAND-OFFTIGHT  [STAND-OFF-TIGHT]  29.72,51.05 270 top
JP42  STAND-OFFTIGHT  [STAND-OFF-TIGHT]  9.4,51.05 270 top
JP43  FIDUCIALUFIDUCIAL  [MICRO-FIDUCIAL]  11.3,52.88 270 top
JP44  FIDUCIALUFIDUCIAL  [MICRO-FIDUCIAL]  29.72,42.16 270 top
JP45  M10"  [1X10]  8.13,39.62 0 top
JP46  STAND-OFFTIGHT  [STAND-OFF-TIGHT]  55.63,51.05 270 top
JP47  STAND-OFFTIGHT  [STAND-OFF-TIGHT]  35.31,51.05 270 top
JP48  FIDUCIALUFIDUCIAL  [MICRO-FIDUCIAL]  37.21,52.88 270 top
JP49  FIDUCIALUFIDUCIAL  [MICRO-FIDUCIAL]  55.63,42.16 270 top
JP50  M10"  [1X10]  34.04,39.62 0 top
JP51  STAND-OFFTIGHT  [STAND-OFF-TIGHT]  81.53,51.05 270 top
JP52  STAND-OFFTIGHT  [STAND-OFF-TIGHT]  61.21,51.05 270 top
JP53  FIDUCIALUFIDUCIAL  [MICRO-FIDUCIAL]  63.12,52.88 270 top
JP54  FIDUCIALUFIDUCIAL  [MICRO-FIDUCIAL]  81.53,42.16 270 top
JP55  M10"  [1X10]  59.94,39.62 0 top
JP56  STAND-OFFTIGHT  [STAND-OFF-TIGHT]  107.44,51.05 270 top
JP57  STAND-OFFTIGHT  [STAND-OFF-TIGHT]  87.12,51.05 270 top
JP58  FIDUCIALUFIDUCIAL  [MICRO-FIDUCIAL]  89.03,52.88 270 top
JP59  FIDUCIALUFIDUCIAL  [MICRO-FIDUCIAL]  107.44,42.16 270 top
JP60  M10"  [1X10]  85.85,39.62 0 top
JP61  STAND-OFFTIGHT  [STAND-OFF-TIGHT]  29.72,66.8 270 top
JP62  STAND-OFFTIGHT  [STAND-OFF-TIGHT]  9.4,66.8 270 top
JP63  FIDUCIALUFIDUCIAL  [MICRO-FIDUCIAL]  11.3,68.63 270 top
JP64  FIDUCIALUFIDUCIAL  [MICRO-FIDUCIAL]  29.72,57.91 270 top
JP65  M10"  [1X10]  8.13,55.37 0 top
JP66  STAND-OFFTIGHT  [STAND-OFF-TIGHT]  55.63,66.8 270 top
JP67  STAND-OFFTIGHT  [STAND-OFF-TIGHT]  35.31,66.8 270 top
JP68  FIDUCIALUFIDUCIAL  [MICRO-FIDUCIAL]  37.21,68.63 270 top
JP69  FIDUCIALUFIDUCIAL  [MICRO-FIDUCIAL]  55.63,57.91 270 top
JP70  M10"  [1X10]  34.04,55.37 0 top
JP71  STAND-OFFTIGHT  [STAND-OFF-TIGHT]  81.53,66.8 270 top
JP72  STAND-OFFTIGHT  [STAND-OFF-TIGHT]  61.21,66.8 270 top
JP73  FIDUCIALUFIDUCIAL  [MICRO-FIDUCIAL]  63.12,68.63 270 top
JP74  FIDUCIALUFIDUCIAL  [MICRO-FIDUCIAL]  81.53,57.91 270 top
JP75  M10"  [1X10]  59.94,55.37 0 top
JP76  STAND-OFFTIGHT  [STAND-OFF-TIGHT]  107.44,66.8 270 top
JP77  STAND-OFFTIGHT  [STAND-OFF-TIGHT]  87.12,66.8 270 top
JP78  FIDUCIALUFIDUCIAL  [MICRO-FIDUCIAL]  89.03,68.63 270 top
JP79  FIDUCIALUFIDUCIAL  [MICRO-FIDUCIAL]  107.44,57.91 270 top
JP80  M10"  [1X10]  85.85,55.37 0 top
JP81  STAND-OFFTIGHT  [STAND-OFF-TIGHT]  29.72,82.55 270 top
JP82  STAND-OFFTIGHT  [STAND-OFF-TIGHT]  9.4,82.55 270 top
JP83  FIDUCIALUFIDUCIAL  [MICRO-FIDUCIAL]  11.3,84.38 270 top
JP84  FIDUCIALUFIDUCIAL  [MICRO-FIDUCIAL]  29.72,73.66 270 top
JP85  M10"  [1X10]  8.13,71.12 0 top
JP86  STAND-OFFTIGHT  [STAND-OFF-TIGHT]  55.63,82.55 270 top
JP87  STAND-OFFTIGHT  [STAND-OFF-TIGHT]  35.31,82.55 270 top
JP88  FIDUCIALUFIDUCIAL  [MICRO-FIDUCIAL]  37.21,84.38 270 top
JP89  FIDUCIALUFIDUCIAL  [MICRO-FIDUCIAL]  55.63,73.66 270 top
JP90  M10"  [1X10]  34.04,71.12 0 top
JP91  STAND-OFFTIGHT  [STAND-OFF-TIGHT]  81.53,82.55 270 top
JP92  STAND-OFFTIGHT  [STAND-OFF-TIGHT]  61.21,82.55 270 top
JP93  FIDUCIALUFIDUCIAL  [MICRO-FIDUCIAL]  63.12,84.38 270 top
JP94  FIDUCIALUFIDUCIAL  [MICRO-FIDUCIAL]  81.53,73.66 270 top
JP95  M10"  [1X10]  59.94,71.12 0 top
JP96  STAND-OFFTIGHT  [STAND-OFF-TIGHT]  107.44,82.55 270 top
JP97  STAND-OFFTIGHT  [STAND-OFF-TIGHT]  87.12,82.55 270 top
JP98  FIDUCIALUFIDUCIAL  [MICRO-FIDUCIAL]  89.03,84.38 270 top
JP99  FIDUCIALUFIDUCIAL  [MICRO-FIDUCIAL]  107.44,73.66 270 top
JP100  M10"  [1X10]  85.85,71.12 0 top
JP101  STAND-OFFTIGHT  [STAND-OFF-TIGHT]  29.72,98.3 270 top
JP102  STAND-OFFTIGHT  [STAND-OFF-TIGHT]  9.4,98.3 270 top
JP103  FIDUCIALUFIDUCIAL  [MICRO-FIDUCIAL]  11.3,100.13 270 top
JP104  FIDUCIALUFIDUCIAL  [MICRO-FIDUCIAL]  29.72,89.41 270 top
JP105  M10"  [1X10]  8.13,86.87 0 top
JP106  STAND-OFFTIGHT  [STAND-OFF-TIGHT]  55.63,98.3 270 top
JP107  STAND-OFFTIGHT  [STAND-OFF-TIGHT]  35.31,98.3 270 top
JP108  FIDUCIALUFIDUCIAL  [MICRO-FIDUCIAL]  37.21,100.13 270 top
JP109  FIDUCIALUFIDUCIAL  [MICRO-FIDUCIAL]  55.63,89.41 270 top
JP110  M10"  [1X10]  34.04,86.87 0 top
JP111  STAND-OFFTIGHT  [STAND-OFF-TIGHT]  81.53,98.3 270 top
JP112  STAND-OFFTIGHT  [STAND-OFF-TIGHT]  61.21,98.3 270 top
JP113  FIDUCIALUFIDUCIAL  [MICRO-FIDUCIAL]  63.12,100.13 270 top
JP114  FIDUCIALUFIDUCIAL  [MICRO-FIDUCIAL]  81.53,89.41 270 top
JP115  M10"  [1X10]  59.94,86.87 0 top
JP116  STAND-OFFTIGHT  [STAND-OFF-TIGHT]  107.44,98.3 270 top
JP117  STAND-OFFTIGHT  [STAND-OFF-TIGHT]  87.12,98.3 270 top
JP118  FIDUCIALUFIDUCIAL  [MICRO-FIDUCIAL]  89.03,100.13 270 top
JP119  FIDUCIALUFIDUCIAL  [MICRO-FIDUCIAL]  107.44,89.41 270 top
JP120  M10"  [1X10]  85.85,86.87 0 top
JP121  STAND-OFFTIGHT  [STAND-OFF-TIGHT]  147.07,19.56 270 top
JP122  STAND-OFFTIGHT  [STAND-OFF-TIGHT]  126.75,19.56 270 top
JP123  FIDUCIALUFIDUCIAL  [MICRO-FIDUCIAL]  128.65,21.39 270 top
JP124  FIDUCIALUFIDUCIAL  [MICRO-FIDUCIAL]  147.07,10.67 270 top
JP125  M10"  [1X10]  125.48,8.13 0 top
JP126  STAND-OFFTIGHT  [STAND-OFF-TIGHT]  172.97,19.56 270 top
JP127  STAND-OFFTIGHT  [STAND-OFF-TIGHT]  152.65,19.56 270 top
JP128  FIDUCIALUFIDUCIAL  [MICRO-FIDUCIAL]  154.56,21.39 270 top
JP129  FIDUCIALUFIDUCIAL  [MICRO-FIDUCIAL]  172.97,10.67 270 top
JP130  M10"  [1X10]  151.38,8.13 0 top
JP131  STAND-OFFTIGHT  [STAND-OFF-TIGHT]  198.88,19.56 270 top
JP132  STAND-OFFTIGHT  [STAND-OFF-TIGHT]  178.56,19.56 270 top
JP133  FIDUCIALUFIDUCIAL  [MICRO-FIDUCIAL]  180.47,21.39 270 top
JP134  FIDUCIALUFIDUCIAL  [MICRO-FIDUCIAL]  198.88,10.67 270 top
JP135  M10"  [1X10]  177.29,8.13 0 top
JP136  STAND-OFFTIGHT  [STAND-OFF-TIGHT]  224.79,19.56 270 top
JP137  STAND-OFFTIGHT  [STAND-OFF-TIGHT]  204.47,19.56 270 top
JP138  FIDUCIALUFIDUCIAL  [MICRO-FIDUCIAL]  206.38,21.39 270 top
JP139  FIDUCIALUFIDUCIAL  [MICRO-FIDUCIAL]  224.79,10.67 270 top
JP140  M10"  [1X10]  203.2,8.13 0 top
JP141  STAND-OFFTIGHT  [STAND-OFF-TIGHT]  147.07,35.31 270 top
JP142  STAND-OFFTIGHT  [STAND-OFF-TIGHT]  126.75,35.31 270 top
JP143  FIDUCIALUFIDUCIAL  [MICRO-FIDUCIAL]  128.65,37.13 270 top
JP144  FIDUCIALUFIDUCIAL  [MICRO-FIDUCIAL]  147.07,26.42 270 top
JP145  M10"  [1X10]  125.48,23.88 0 top
JP146  STAND-OFFTIGHT  [STAND-OFF-TIGHT]  172.97,35.31 270 top
JP147  STAND-OFFTIGHT  [STAND-OFF-TIGHT]  152.65,35.31 270 top
JP148  FIDUCIALUFIDUCIAL  [MICRO-FIDUCIAL]  154.56,37.13 270 top
JP149  FIDUCIALUFIDUCIAL  [MICRO-FIDUCIAL]  172.97,26.42 270 top
JP150  M10"  [1X10]  151.38,23.88 0 top
JP151  STAND-OFFTIGHT  [STAND-OFF-TIGHT]  198.88,35.31 270 top
JP152  STAND-OFFTIGHT  [STAND-OFF-TIGHT]  178.56,35.31 270 top
JP153  FIDUCIALUFIDUCIAL  [MICRO-FIDUCIAL]  180.47,37.13 270 top
JP154  FIDUCIALUFIDUCIAL  [MICRO-FIDUCIAL]  198.88,26.42 270 top
JP155  M10"  [1X10]  177.29,23.88 0 top
JP156  STAND-OFFTIGHT  [STAND-OFF-TIGHT]  224.79,35.31 270 top
JP157  STAND-OFFTIGHT  [STAND-OFF-TIGHT]  204.47,35.31 270 top
JP158  FIDUCIALUFIDUCIAL  [MICRO-FIDUCIAL]  206.38,37.13 270 top
JP159  FIDUCIALUFIDUCIAL  [MICRO-FIDUCIAL]  224.79,26.42 270 top
JP160  M10"  [1X10]  203.2,23.88 0 top
JP161  STAND-OFFTIGHT  [STAND-OFF-TIGHT]  147.07,51.05 270 top
JP162  STAND-OFFTIGHT  [STAND-OFF-TIGHT]  126.75,51.05 270 top
JP163  FIDUCIALUFIDUCIAL  [MICRO-FIDUCIAL]  128.65,52.88 270 top
JP164  FIDUCIALUFIDUCIAL  [MICRO-FIDUCIAL]  147.07,42.16 270 top
JP165  M10"  [1X10]  125.48,39.62 0 top
JP166  STAND-OFFTIGHT  [STAND-OFF-TIGHT]  172.97,51.05 270 top
JP167  STAND-OFFTIGHT  [STAND-OFF-TIGHT]  152.65,51.05 270 top
JP168  FIDUCIALUFIDUCIAL  [MICRO-FIDUCIAL]  154.56,52.88 270 top
JP169  FIDUCIALUFIDUCIAL  [MICRO-FIDUCIAL]  172.97,42.16 270 top
JP170  M10"  [1X10]  151.38,39.62 0 top
JP171  STAND-OFFTIGHT  [STAND-OFF-TIGHT]  198.88,51.05 270 top
JP172  STAND-OFFTIGHT  [STAND-OFF-TIGHT]  178.56,51.05 270 top
JP173  FIDUCIALUFIDUCIAL  [MICRO-FIDUCIAL]  180.47,52.88 270 top
JP174  FIDUCIALUFIDUCIAL  [MICRO-FIDUCIAL]  198.88,42.16 270 top
JP175  M10"  [1X10]  177.29,39.62 0 top
JP176  STAND-OFFTIGHT  [STAND-OFF-TIGHT]  224.79,51.05 270 top
JP177  STAND-OFFTIGHT  [STAND-OFF-TIGHT]  204.47,51.05 270 top
JP178  FIDUCIALUFIDUCIAL  [MICRO-FIDUCIAL]  206.38,52.88 270 top
JP179  FIDUCIALUFIDUCIAL  [MICRO-FIDUCIAL]  224.79,42.16 270 top
JP180  M10"  [1X10]  203.2,39.62 0 top
JP181  STAND-OFFTIGHT  [STAND-OFF-TIGHT]  147.07,66.8 270 top
JP182  STAND-OFFTIGHT  [STAND-OFF-TIGHT]  126.75,66.8 270 top
JP183  FIDUCIALUFIDUCIAL  [MICRO-FIDUCIAL]  128.65,68.63 270 top
JP184  FIDUCIALUFIDUCIAL  [MICRO-FIDUCIAL]  147.07,57.91 270 top
JP185  M10"  [1X10]  125.48,55.37 0 top
JP186  STAND-OFFTIGHT  [STAND-OFF-TIGHT]  172.97,66.8 270 top
JP187  STAND-OFFTIGHT  [STAND-OFF-TIGHT]  152.65,66.8 270 top
JP188  FIDUCIALUFIDUCIAL  [MICRO-FIDUCIAL]  154.56,68.63 270 top
JP189  FIDUCIALUFIDUCIAL  [MICRO-FIDUCIAL]  172.97,57.91 270 top
JP190  M10"  [1X10]  151.38,55.37 0 top
JP191  STAND-OFFTIGHT  [STAND-OFF-TIGHT]  198.88,66.8 270 top
JP192  STAND-OFFTIGHT  [STAND-OFF-TIGHT]  178.56,66.8 270 top
JP193  FIDUCIALUFIDUCIAL  [MICRO-FIDUCIAL]  180.47,68.63 270 top
JP194  FIDUCIALUFIDUCIAL  [MICRO-FIDUCIAL]  198.88,57.91 270 top
JP195  M10"  [1X10]  177.29,55.37 0 top
JP196  STAND-OFFTIGHT  [STAND-OFF-TIGHT]  224.79,66.8 270 top
JP197  STAND-OFFTIGHT  [STAND-OFF-TIGHT]  204.47,66.8 270 top
JP198  FIDUCIALUFIDUCIAL  [MICRO-FIDUCIAL]  206.38,68.63 270 top
JP199  FIDUCIALUFIDUCIAL  [MICRO-FIDUCIAL]  224.79,57.91 270 top
JP200  M10"  [1X10]  203.2,55.37 0 top
JP201  STAND-OFFTIGHT  [STAND-OFF-TIGHT]  147.07,82.55 270 top
JP202  STAND-OFFTIGHT  [STAND-OFF-TIGHT]  126.75,82.55 270 top
JP203  FIDUCIALUFIDUCIAL  [MICRO-FIDUCIAL]  128.65,84.38 270 top
JP204  FIDUCIALUFIDUCIAL  [MICRO-FIDUCIAL]  147.07,73.66 270 top
JP205  M10"  [1X10]  125.48,71.12 0 top
JP206  STAND-OFFTIGHT  [STAND-OFF-TIGHT]  172.97,82.55 270 top
JP207  STAND-OFFTIGHT  [STAND-OFF-TIGHT]  152.65,82.55 270 top
JP208  FIDUCIALUFIDUCIAL  [MICRO-FIDUCIAL]  154.56,84.38 270 top
JP209  FIDUCIALUFIDUCIAL  [MICRO-FIDUCIAL]  172.97,73.66 270 top
JP210  M10"  [1X10]  151.38,71.12 0 top
JP211  STAND-OFFTIGHT  [STAND-OFF-TIGHT]  198.88,82.55 270 top
JP212  STAND-OFFTIGHT  [STAND-OFF-TIGHT]  178.56,82.55 270 top
JP213  FIDUCIALUFIDUCIAL  [MICRO-FIDUCIAL]  180.47,84.38 270 top
JP214  FIDUCIALUFIDUCIAL  [MICRO-FIDUCIAL]  198.88,73.66 270 top
JP215  M10"  [1X10]  177.29,71.12 0 top
JP216  STAND-OFFTIGHT  [STAND-OFF-TIGHT]  224.79,82.55 270 top
JP217  STAND-OFFTIGHT  [STAND-OFF-TIGHT]  204.47,82.55 270 top
JP218  FIDUCIALUFIDUCIAL  [MICRO-FIDUCIAL]  206.38,84.38 270 top
JP219  FIDUCIALUFIDUCIAL  [MICRO-FIDUCIAL]  224.79,73.66 270 top
JP220  M10"  [1X10]  203.2,71.12 0 top
JP221  STAND-OFFTIGHT  [STAND-OFF-TIGHT]  147.07,98.3 270 top
JP222  STAND-OFFTIGHT  [STAND-OFF-TIGHT]  126.75,98.3 270 top
JP223  FIDUCIALUFIDUCIAL  [MICRO-FIDUCIAL]  128.65,100.13 270 top
JP224  FIDUCIALUFIDUCIAL  [MICRO-FIDUCIAL]  147.07,89.41 270 top
JP225  M10"  [1X10]  125.48,86.87 0 top
JP226  STAND-OFFTIGHT  [STAND-OFF-TIGHT]  172.97,98.3 270 top
JP227  STAND-OFFTIGHT  [STAND-OFF-TIGHT]  152.65,98.3 270 top
JP228  FIDUCIALUFIDUCIAL  [MICRO-FIDUCIAL]  154.56,100.13 270 top
JP229  FIDUCIALUFIDUCIAL  [MICRO-FIDUCIAL]  172.97,89.41 270 top
JP230  M10"  [1X10]  151.38,86.87 0 top
JP231  STAND-OFFTIGHT  [STAND-OFF-TIGHT]  198.88,98.3 270 top
JP232  STAND-OFFTIGHT  [STAND-OFF-TIGHT]  178.56,98.3 270 top
JP233  FIDUCIALUFIDUCIAL  [MICRO-FIDUCIAL]  180.47,100.13 270 top
JP234  FIDUCIALUFIDUCIAL  [MICRO-FIDUCIAL]  198.88,89.41 270 top
JP235  M10"  [1X10]  177.29,86.87 0 top
JP236  STAND-OFFTIGHT  [STAND-OFF-TIGHT]  224.79,98.3 270 top
JP237  STAND-OFFTIGHT  [STAND-OFF-TIGHT]  204.47,98.3 270 top
JP238  FIDUCIALUFIDUCIAL  [MICRO-FIDUCIAL]  206.38,100.13 270 top
JP239  FIDUCIALUFIDUCIAL  [MICRO-FIDUCIAL]  224.79,89.41 270 top
JP240  M10"  [1X10]  203.2,86.87 0 top
JP241  STAND-OFFTIGHT  [STAND-OFF-TIGHT]  29.72,127.76 270 top
JP242  STAND-OFFTIGHT  [STAND-OFF-TIGHT]  9.4,127.76 270 top
JP243  FIDUCIALUFIDUCIAL  [MICRO-FIDUCIAL]  11.3,129.59 270 top
JP244  FIDUCIALUFIDUCIAL  [MICRO-FIDUCIAL]  29.72,118.87 270 top
JP245  M10"  [1X10]  8.13,116.33 0 top
JP246  STAND-OFFTIGHT  [STAND-OFF-TIGHT]  55.63,127.76 270 top
JP247  STAND-OFFTIGHT  [STAND-OFF-TIGHT]  35.31,127.76 270 top
JP248  FIDUCIALUFIDUCIAL  [MICRO-FIDUCIAL]  37.21,129.59 270 top
JP249  FIDUCIALUFIDUCIAL  [MICRO-FIDUCIAL]  55.63,118.87 270 top
JP250  M10"  [1X10]  34.04,116.33 0 top
JP251  STAND-OFFTIGHT  [STAND-OFF-TIGHT]  81.53,127.76 270 top
JP252  STAND-OFFTIGHT  [STAND-OFF-TIGHT]  61.21,127.76 270 top
JP253  FIDUCIALUFIDUCIAL  [MICRO-FIDUCIAL]  63.12,129.59 270 top
JP254  FIDUCIALUFIDUCIAL  [MICRO-FIDUCIAL]  81.53,118.87 270 top
JP255  M10"  [1X10]  59.94,116.33 0 top
JP256  STAND-OFFTIGHT  [STAND-OFF-TIGHT]  107.44,127.76 270 top
JP257  STAND-OFFTIGHT  [STAND-OFF-TIGHT]  87.12,127.76 270 top
JP258  FIDUCIALUFIDUCIAL  [MICRO-FIDUCIAL]  89.03,129.59 270 top
JP259  FIDUCIALUFIDUCIAL  [MICRO-FIDUCIAL]  107.44,118.87 270 top
JP260  M10"  [1X10]  85.85,116.33 0 top
JP261  STAND-OFFTIGHT  [STAND-OFF-TIGHT]  29.72,143.51 270 top
JP262  STAND-OFFTIGHT  [STAND-OFF-TIGHT]  9.4,143.51 270 top
JP263  FIDUCIALUFIDUCIAL  [MICRO-FIDUCIAL]  11.3,145.34 270 top
JP264  FIDUCIALUFIDUCIAL  [MICRO-FIDUCIAL]  29.72,134.62 270 top
JP265  M10"  [1X10]  8.13,132.08 0 top
JP266  STAND-OFFTIGHT  [STAND-OFF-TIGHT]  55.63,143.51 270 top
JP267  STAND-OFFTIGHT  [STAND-OFF-TIGHT]  35.31,143.51 270 top
JP268  FIDUCIALUFIDUCIAL  [MICRO-FIDUCIAL]  37.21,145.34 270 top
JP269  FIDUCIALUFIDUCIAL  [MICRO-FIDUCIAL]  55.63,134.62 270 top
JP270  M10"  [1X10]  34.04,132.08 0 top
JP271  STAND-OFFTIGHT  [STAND-OFF-TIGHT]  81.53,143.51 270 top
JP272  STAND-OFFTIGHT  [STAND-OFF-TIGHT]  61.21,143.51 270 top
JP273  FIDUCIALUFIDUCIAL  [MICRO-FIDUCIAL]  63.12,145.34 270 top
JP274  FIDUCIALUFIDUCIAL  [MICRO-FIDUCIAL]  81.53,134.62 270 top
JP275  M10"  [1X10]  59.94,132.08 0 top
JP276  STAND-OFFTIGHT  [STAND-OFF-TIGHT]  107.44,143.51 270 top
JP277  STAND-OFFTIGHT  [STAND-OFF-TIGHT]  87.12,143.51 270 top
JP278  FIDUCIALUFIDUCIAL  [MICRO-FIDUCIAL]  89.03,145.34 270 top
JP279  FIDUCIALUFIDUCIAL  [MICRO-FIDUCIAL]  107.44,134.62 270 top
JP280  M10"  [1X10]  85.85,132.08 0 top
JP281  STAND-OFFTIGHT  [STAND-OFF-TIGHT]  29.72,159.26 270 top
JP282  STAND-OFFTIGHT  [STAND-OFF-TIGHT]  9.4,159.26 270 top
JP283  FIDUCIALUFIDUCIAL  [MICRO-FIDUCIAL]  11.3,161.09 270 top
JP284  FIDUCIALUFIDUCIAL  [MICRO-FIDUCIAL]  29.72,150.37 270 top
JP285  M10"  [1X10]  8.13,147.83 0 top
JP286  STAND-OFFTIGHT  [STAND-OFF-TIGHT]  55.63,159.26 270 top
JP287  STAND-OFFTIGHT  [STAND-OFF-TIGHT]  35.31,159.26 270 top
JP288  FIDUCIALUFIDUCIAL  [MICRO-FIDUCIAL]  37.21,161.09 270 top
JP289  FIDUCIALUFIDUCIAL  [MICRO-FIDUCIAL]  55.63,150.37 270 top
JP290  M10"  [1X10]  34.04,147.83 0 top
JP291  STAND-OFFTIGHT  [STAND-OFF-TIGHT]  81.53,159.26 270 top
JP292  STAND-OFFTIGHT  [STAND-OFF-TIGHT]  61.21,159.26 270 top
JP293  FIDUCIALUFIDUCIAL  [MICRO-FIDUCIAL]  63.12,161.09 270 top
JP294  FIDUCIALUFIDUCIAL  [MICRO-FIDUCIAL]  81.53,150.37 270 top
JP295  M10"  [1X10]  59.94,147.83 0 top
JP296  STAND-OFFTIGHT  [STAND-OFF-TIGHT]  107.44,159.26 270 top
JP297  STAND-OFFTIGHT  [STAND-OFF-TIGHT]  87.12,159.26 270 top
JP298  FIDUCIALUFIDUCIAL  [MICRO-FIDUCIAL]  89.03,161.09 270 top
JP299  FIDUCIALUFIDUCIAL  [MICRO-FIDUCIAL]  107.44,150.37 270 top
JP300  M10"  [1X10]  85.85,147.83 0 top
JP301  STAND-OFFTIGHT  [STAND-OFF-TIGHT]  29.72,175.01 270 top
JP302  STAND-OFFTIGHT  [STAND-OFF-TIGHT]  9.4,175.01 270 top
JP303  FIDUCIALUFIDUCIAL  [MICRO-FIDUCIAL]  11.3,176.83 270 top
JP304  FIDUCIALUFIDUCIAL  [MICRO-FIDUCIAL]  29.72,166.12 270 top
JP305  M10"  [1X10]  8.13,163.58 0 top
JP306  STAND-OFFTIGHT  [STAND-OFF-TIGHT]  55.63,175.01 270 top
JP307  STAND-OFFTIGHT  [STAND-OFF-TIGHT]  35.31,175.01 270 top
JP308  FIDUCIALUFIDUCIAL  [MICRO-FIDUCIAL]  37.21,176.83 270 top
JP309  FIDUCIALUFIDUCIAL  [MICRO-FIDUCIAL]  55.63,166.12 270 top
JP310  M10"  [1X10]  34.04,163.58 0 top
JP311  STAND-OFFTIGHT  [STAND-OFF-TIGHT]  81.53,175.01 270 top
JP312  STAND-OFFTIGHT  [STAND-OFF-TIGHT]  61.21,175.01 270 top
JP313  FIDUCIALUFIDUCIAL  [MICRO-FIDUCIAL]  63.12,176.83 270 top
JP314  FIDUCIALUFIDUCIAL  [MICRO-FIDUCIAL]  81.53,166.12 270 top
JP315  M10"  [1X10]  59.94,163.58 0 top
JP316  STAND-OFFTIGHT  [STAND-OFF-TIGHT]  107.44,175.01 270 top
JP317  STAND-OFFTIGHT  [STAND-OFF-TIGHT]  87.12,175.01 270 top
JP318  FIDUCIALUFIDUCIAL  [MICRO-FIDUCIAL]  89.03,176.83 270 top
JP319  FIDUCIALUFIDUCIAL  [MICRO-FIDUCIAL]  107.44,166.12 270 top
JP320  M10"  [1X10]  85.85,163.58 0 top
JP321  STAND-OFFTIGHT  [STAND-OFF-TIGHT]  29.72,190.75 270 top
JP322  STAND-OFFTIGHT  [STAND-OFF-TIGHT]  9.4,190.75 270 top
JP323  FIDUCIALUFIDUCIAL  [MICRO-FIDUCIAL]  11.3,192.58 270 top
JP324  FIDUCIALUFIDUCIAL  [MICRO-FIDUCIAL]  29.72,181.86 270 top
JP325  M10"  [1X10]  8.13,179.32 0 top
JP326  STAND-OFFTIGHT  [STAND-OFF-TIGHT]  55.63,190.75 270 top
JP327  STAND-OFFTIGHT  [STAND-OFF-TIGHT]  35.31,190.75 270 top
JP328  FIDUCIALUFIDUCIAL  [MICRO-FIDUCIAL]  37.21,192.58 270 top
JP329  FIDUCIALUFIDUCIAL  [MICRO-FIDUCIAL]  55.63,181.86 270 top
JP330  M10"  [1X10]  34.04,179.32 0 top
JP331  STAND-OFFTIGHT  [STAND-OFF-TIGHT]  81.53,190.75 270 top
JP332  STAND-OFFTIGHT  [STAND-OFF-TIGHT]  61.21,190.75 270 top
JP333  FIDUCIALUFIDUCIAL  [MICRO-FIDUCIAL]  63.12,192.58 270 top
JP334  FIDUCIALUFIDUCIAL  [MICRO-FIDUCIAL]  81.53,181.86 270 top
JP335  M10"  [1X10]  59.94,179.32 0 top
JP336  STAND-OFFTIGHT  [STAND-OFF-TIGHT]  107.44,190.75 270 top
JP337  STAND-OFFTIGHT  [STAND-OFF-TIGHT]  87.12,190.75 270 top
JP338  FIDUCIALUFIDUCIAL  [MICRO-FIDUCIAL]  89.03,192.58 270 top
JP339  FIDUCIALUFIDUCIAL  [MICRO-FIDUCIAL]  107.44,181.86 270 top
JP340  M10"  [1X10]  85.85,179.32 0 top
JP341  STAND-OFFTIGHT  [STAND-OFF-TIGHT]  29.72,206.5 270 top
JP342  STAND-OFFTIGHT  [STAND-OFF-TIGHT]  9.4,206.5 270 top
JP343  FIDUCIALUFIDUCIAL  [MICRO-FIDUCIAL]  11.3,208.33 270 top
JP344  FIDUCIALUFIDUCIAL  [MICRO-FIDUCIAL]  29.72,197.61 270 top
JP345  M10"  [1X10]  8.13,195.07 0 top
JP346  STAND-OFFTIGHT  [STAND-OFF-TIGHT]  55.63,206.5 270 top
JP347  STAND-OFFTIGHT  [STAND-OFF-TIGHT]  35.31,206.5 270 top
JP348  FIDUCIALUFIDUCIAL  [MICRO-FIDUCIAL]  37.21,208.33 270 top
JP349  FIDUCIALUFIDUCIAL  [MICRO-FIDUCIAL]  55.63,197.61 270 top
JP350  M10"  [1X10]  34.04,195.07 0 top
JP351  STAND-OFFTIGHT  [STAND-OFF-TIGHT]  81.53,206.5 270 top
JP352  STAND-OFFTIGHT  [STAND-OFF-TIGHT]  61.21,206.5 270 top
JP353  FIDUCIALUFIDUCIAL  [MICRO-FIDUCIAL]  63.12,208.33 270 top
JP354  FIDUCIALUFIDUCIAL  [MICRO-FIDUCIAL]  81.53,197.61 270 top
JP355  M10"  [1X10]  59.94,195.07 0 top
JP356  STAND-OFFTIGHT  [STAND-OFF-TIGHT]  107.44,206.5 270 top
JP357  STAND-OFFTIGHT  [STAND-OFF-TIGHT]  87.12,206.5 270 top
JP358  FIDUCIALUFIDUCIAL  [MICRO-FIDUCIAL]  89.03,208.33 270 top
JP359  FIDUCIALUFIDUCIAL  [MICRO-FIDUCIAL]  107.44,197.61 270 top
JP360  M10"  [1X10]  85.85,195.07 0 top
JP361  STAND-OFFTIGHT  [STAND-OFF-TIGHT]  147.07,127.76 270 top
JP362  STAND-OFFTIGHT  [STAND-OFF-TIGHT]  126.75,127.76 270 top
JP363  FIDUCIALUFIDUCIAL  [MICRO-FIDUCIAL]  128.65,129.59 270 top
JP364  FIDUCIALUFIDUCIAL  [MICRO-FIDUCIAL]  147.07,118.87 270 top
JP365  M10"  [1X10]  125.48,116.33 0 top
JP366  STAND-OFFTIGHT  [STAND-OFF-TIGHT]  172.97,127.76 270 top
JP367  STAND-OFFTIGHT  [STAND-OFF-TIGHT]  152.65,127.76 270 top
JP368  FIDUCIALUFIDUCIAL  [MICRO-FIDUCIAL]  154.56,129.59 270 top
JP369  FIDUCIALUFIDUCIAL  [MICRO-FIDUCIAL]  172.97,118.87 270 top
JP370  M10"  [1X10]  151.38,116.33 0 top
JP371  STAND-OFFTIGHT  [STAND-OFF-TIGHT]  198.88,127.76 270 top
JP372  STAND-OFFTIGHT  [STAND-OFF-TIGHT]  178.56,127.76 270 top
JP373  FIDUCIALUFIDUCIAL  [MICRO-FIDUCIAL]  180.47,129.59 270 top
JP374  FIDUCIALUFIDUCIAL  [MICRO-FIDUCIAL]  198.88,118.87 270 top
JP375  M10"  [1X10]  177.29,116.33 0 top
JP376  STAND-OFFTIGHT  [STAND-OFF-TIGHT]  224.79,127.76 270 top
JP377  STAND-OFFTIGHT  [STAND-OFF-TIGHT]  204.47,127.76 270 top
JP378  FIDUCIALUFIDUCIAL  [MICRO-FIDUCIAL]  206.38,129.59 270 top
JP379  FIDUCIALUFIDUCIAL  [MICRO-FIDUCIAL]  224.79,118.87 270 top
JP380  M10"  [1X10]  203.2,116.33 0 top
JP381  STAND-OFFTIGHT  [STAND-OFF-TIGHT]  147.07,143.51 270 top
JP382  STAND-OFFTIGHT  [STAND-OFF-TIGHT]  126.75,143.51 270 top
JP383  FIDUCIALUFIDUCIAL  [MICRO-FIDUCIAL]  128.65,145.34 270 top
JP384  FIDUCIALUFIDUCIAL  [MICRO-FIDUCIAL]  147.07,134.62 270 top
JP385  M10"  [1X10]  125.48,132.08 0 top
JP386  STAND-OFFTIGHT  [STAND-OFF-TIGHT]  172.97,143.51 270 top
JP387  STAND-OFFTIGHT  [STAND-OFF-TIGHT]  152.65,143.51 270 top
JP388  FIDUCIALUFIDUCIAL  [MICRO-FIDUCIAL]  154.56,145.34 270 top
JP389  FIDUCIALUFIDUCIAL  [MICRO-FIDUCIAL]  172.97,134.62 270 top
JP390  M10"  [1X10]  151.38,132.08 0 top
JP391  STAND-OFFTIGHT  [STAND-OFF-TIGHT]  198.88,143.51 270 top
JP392  STAND-OFFTIGHT  [STAND-OFF-TIGHT]  178.56,143.51 270 top
JP393  FIDUCIALUFIDUCIAL  [MICRO-FIDUCIAL]  180.47,145.34 270 top
JP394  FIDUCIALUFIDUCIAL  [MICRO-FIDUCIAL]  198.88,134.62 270 top
JP395  M10"  [1X10]  177.29,132.08 0 top
JP396  STAND-OFFTIGHT  [STAND-OFF-TIGHT]  224.79,143.51 270 top
JP397  STAND-OFFTIGHT  [STAND-OFF-TIGHT]  204.47,143.51 270 top
JP398  FIDUCIALUFIDUCIAL  [MICRO-FIDUCIAL]  206.38,145.34 270 top
JP399  FIDUCIALUFIDUCIAL  [MICRO-FIDUCIAL]  224.79,134.62 270 top
JP400  M10"  [1X10]  203.2,132.08 0 top
JP401  STAND-OFFTIGHT  [STAND-OFF-TIGHT]  147.07,159.26 270 top
JP402  STAND-OFFTIGHT  [STAND-OFF-TIGHT]  126.75,159.26 270 top
JP403  FIDUCIALUFIDUCIAL  [MICRO-FIDUCIAL]  128.65,161.09 270 top
JP404  FIDUCIALUFIDUCIAL  [MICRO-FIDUCIAL]  147.07,150.37 270 top
JP405  M10"  [1X10]  125.48,147.83 0 top
JP406  STAND-OFFTIGHT  [STAND-OFF-TIGHT]  172.97,159.26 270 top
JP407  STAND-OFFTIGHT  [STAND-OFF-TIGHT]  152.65,159.26 270 top
JP408  FIDUCIALUFIDUCIAL  [MICRO-FIDUCIAL]  154.56,161.09 270 top
JP409  FIDUCIALUFIDUCIAL  [MICRO-FIDUCIAL]  172.97,150.37 270 top
JP410  M10"  [1X10]  151.38,147.83 0 top
JP411  STAND-OFFTIGHT  [STAND-OFF-TIGHT]  198.88,159.26 270 top
JP412  STAND-OFFTIGHT  [STAND-OFF-TIGHT]  178.56,159.26 270 top
JP413  FIDUCIALUFIDUCIAL  [MICRO-FIDUCIAL]  180.47,161.09 270 top
JP414  FIDUCIALUFIDUCIAL  [MICRO-FIDUCIAL]  198.88,150.37 270 top
JP415  M10"  [1X10]  177.29,147.83 0 top
JP416  STAND-OFFTIGHT  [STAND-OFF-TIGHT]  224.79,159.26 270 top
JP417  STAND-OFFTIGHT  [STAND-OFF-TIGHT]  204.47,159.26 270 top
JP418  FIDUCIALUFIDUCIAL  [MICRO-FIDUCIAL]  206.38,161.09 270 top
JP419  FIDUCIALUFIDUCIAL  [MICRO-FIDUCIAL]  224.79,150.37 270 top
JP420  M10"  [1X10]  203.2,147.83 0 top
JP421  STAND-OFFTIGHT  [STAND-OFF-TIGHT]  147.07,175.01 270 top
JP422  STAND-OFFTIGHT  [STAND-OFF-TIGHT]  126.75,175.01 270 top
JP423  FIDUCIALUFIDUCIAL  [MICRO-FIDUCIAL]  128.65,176.83 270 top
JP424  FIDUCIALUFIDUCIAL  [MICRO-FIDUCIAL]  147.07,166.12 270 top
JP425  M10"  [1X10]  125.48,163.58 0 top
JP426  STAND-OFFTIGHT  [STAND-OFF-TIGHT]  172.97,175.01 270 top
JP427  STAND-OFFTIGHT  [STAND-OFF-TIGHT]  152.65,175.01 270 top
JP428  FIDUCIALUFIDUCIAL  [MICRO-FIDUCIAL]  154.56,176.83 270 top
JP429  FIDUCIALUFIDUCIAL  [MICRO-FIDUCIAL]  172.97,166.12 270 top
JP430  M10"  [1X10]  151.38,163.58 0 top
JP431  STAND-OFFTIGHT  [STAND-OFF-TIGHT]  198.88,175.01 270 top
JP432  STAND-OFFTIGHT  [STAND-OFF-TIGHT]  178.56,175.01 270 top
JP433  FIDUCIALUFIDUCIAL  [MICRO-FIDUCIAL]  180.47,176.83 270 top
JP434  FIDUCIALUFIDUCIAL  [MICRO-FIDUCIAL]  198.88,166.12 270 top
JP435  M10"  [1X10]  177.29,163.58 0 top
JP436  STAND-OFFTIGHT  [STAND-OFF-TIGHT]  224.79,175.01 270 top
JP437  STAND-OFFTIGHT  [STAND-OFF-TIGHT]  204.47,175.01 270 top
JP438  FIDUCIALUFIDUCIAL  [MICRO-FIDUCIAL]  206.38,176.83 270 top
JP439  FIDUCIALUFIDUCIAL  [MICRO-FIDUCIAL]  224.79,166.12 270 top
JP440  M10"  [1X10]  203.2,163.58 0 top
JP441  STAND-OFFTIGHT  [STAND-OFF-TIGHT]  147.07,190.75 270 top
JP442  STAND-OFFTIGHT  [STAND-OFF-TIGHT]  126.75,190.75 270 top
JP443  FIDUCIALUFIDUCIAL  [MICRO-FIDUCIAL]  128.65,192.58 270 top
JP444  FIDUCIALUFIDUCIAL  [MICRO-FIDUCIAL]  147.07,181.86 270 top
JP445  M10"  [1X10]  125.48,179.32 0 top
JP446  STAND-OFFTIGHT  [STAND-OFF-TIGHT]  172.97,190.75 270 top
JP447  STAND-OFFTIGHT  [STAND-OFF-TIGHT]  152.65,190.75 270 top
JP448  FIDUCIALUFIDUCIAL  [MICRO-FIDUCIAL]  154.56,192.58 270 top
JP449  FIDUCIALUFIDUCIAL  [MICRO-FIDUCIAL]  172.97,181.86 270 top
JP450  M10"  [1X10]  151.38,179.32 0 top
JP451  STAND-OFFTIGHT  [STAND-OFF-TIGHT]  198.88,190.75 270 top
JP452  STAND-OFFTIGHT  [STAND-OFF-TIGHT]  178.56,190.75 270 top
JP453  FIDUCIALUFIDUCIAL  [MICRO-FIDUCIAL]  180.47,192.58 270 top
JP454  FIDUCIALUFIDUCIAL  [MICRO-FIDUCIAL]  198.88,181.86 270 top
JP455  M10"  [1X10]  177.29,179.32 0 top
JP456  STAND-OFFTIGHT  [STAND-OFF-TIGHT]  224.79,190.75 270 top
JP457  STAND-OFFTIGHT  [STAND-OFF-TIGHT]  204.47,190.75 270 top
JP458  FIDUCIALUFIDUCIAL  [MICRO-FIDUCIAL]  206.38,192.58 270 top
JP459  FIDUCIALUFIDUCIAL  [MICRO-FIDUCIAL]  224.79,181.86 270 top
JP460  M10"  [1X10]  203.2,179.32 0 top
JP461  STAND-OFFTIGHT  [STAND-OFF-TIGHT]  147.07,206.5 270 top
JP462  STAND-OFFTIGHT  [STAND-OFF-TIGHT]  126.75,206.5 270 top
JP463  FIDUCIALUFIDUCIAL  [MICRO-FIDUCIAL]  128.65,208.33 270 top
JP464  FIDUCIALUFIDUCIAL  [MICRO-FIDUCIAL]  147.07,197.61 270 top
JP465  M10"  [1X10]  125.48,195.07 0 top
JP466  STAND-OFFTIGHT  [STAND-OFF-TIGHT]  172.97,206.5 270 top
JP467  STAND-OFFTIGHT  [STAND-OFF-TIGHT]  152.65,206.5 270 top
JP468  FIDUCIALUFIDUCIAL  [MICRO-FIDUCIAL]  154.56,208.33 270 top
JP469  FIDUCIALUFIDUCIAL  [MICRO-FIDUCIAL]  172.97,197.61 270 top
JP470  M10"  [1X10]  151.38,195.07 0 top
JP471  STAND-OFFTIGHT  [STAND-OFF-TIGHT]  198.88,206.5 270 top
JP472  STAND-OFFTIGHT  [STAND-OFF-TIGHT]  178.56,206.5 270 top
JP473  FIDUCIALUFIDUCIAL  [MICRO-FIDUCIAL]  180.47,208.33 270 top
JP474  FIDUCIALUFIDUCIAL  [MICRO-FIDUCIAL]  198.88,197.61 270 top
JP475  M10"  [1X10]  177.29,195.07 0 top
JP476  STAND-OFFTIGHT  [STAND-OFF-TIGHT]  224.79,206.5 270 top
JP477  STAND-OFFTIGHT  [STAND-OFF-TIGHT]  204.47,206.5 270 top
JP478  FIDUCIALUFIDUCIAL  [MICRO-FIDUCIAL]  206.38,208.33 270 top
JP479  FIDUCIALUFIDUCIAL  [MICRO-FIDUCIAL]  224.79,197.61 270 top
JP480  M10"  [1X10]  203.2,195.07 0 top
R1  10k  [0603-RES]  13.46,20.78 180 top
R2  10k  [0603-RES]  13.46,19.25 180 top
R3  10k  [0603-RES]  39.37,20.78 180 top
R4  10k  [0603-RES]  39.37,19.25 180 top
R5  10k  [0603-RES]  65.28,20.78 180 top
R6  10k  [0603-RES]  65.28,19.25 180 top
R7  10k  [0603-RES]  91.19,20.78 180 top
R8  10k  [0603-RES]  91.19,19.25 180 top
R9  10k  [0603-RES]  13.46,36.53 180 top
R10  10k  [0603-RES]  13.46,35 180 top
R11  10k  [0603-RES]  39.37,36.53 180 top
R12  10k  [0603-RES]  39.37,35 180 top
R13  10k  [0603-RES]  65.28,36.53 180 top
R14  10k  [0603-RES]  65.28,35 180 top
R15  10k  [0603-RES]  91.19,36.53 180 top
R16  10k  [0603-RES]  91.19,35 180 top
R17  10k  [0603-RES]  13.46,52.27 180 top
R18  10k  [0603-RES]  13.46,50.75 180 top
R19  10k  [0603-RES]  39.37,52.27 180 top
R20  10k  [0603-RES]  39.37,50.75 180 top
R21  10k  [0603-RES]  65.28,52.27 180 top
R22  10k  [0603-RES]  65.28,50.75 180 top
R23  10k  [0603-RES]  91.19,52.27 180 top
R24  10k  [0603-RES]  91.19,50.75 180 top
R25  10k  [0603-RES]  13.46,68.02 180 top
R26  10k  [0603-RES]  13.46,66.5 180 top
R27  10k  [0603-RES]  39.37,68.02 180 top
R28  10k  [0603-RES]  39.37,66.5 180 top
R29  10k  [0603-RES]  65.28,68.02 180 top
R30  10k  [0603-RES]  65.28,66.5 180 top
R31  10k  [0603-RES]  91.19,68.02 180 top
R32  10k  [0603-RES]  91.19,66.5 180 top
R33  10k  [0603-RES]  13.46,83.77 180 top
R34  10k  [0603-RES]  13.46,82.25 180 top
R35  10k  [0603-RES]  39.37,83.77 180 top
R36  10k  [0603-RES]  39.37,82.25 180 top
R37  10k  [0603-RES]  65.28,83.77 180 top
R38  10k  [0603-RES]  65.28,82.25 180 top
R39  10k  [0603-RES]  91.19,83.77 180 top
R40  10k  [0603-RES]  91.19,82.25 180 top
R41  10k  [0603-RES]  13.46,99.52 180 top